# Altium PCB radxa_nx5_io_board_v1.4.PcbDoc (part 1 of 6)
Units mil, origin at the board's own origin, x right, y up, seen from the top; angles counter-clockwise.
Board outline 3937.73 x 3112.19 mil, 6 copper layers (Top, GND02, 内层3, Power4, 内层 5, Bottom), stack 58.1 mil thick; 363 components, 344 nets, 1618 pads, 1594 vias.
Unrouted connection lines stored in the file: 899.
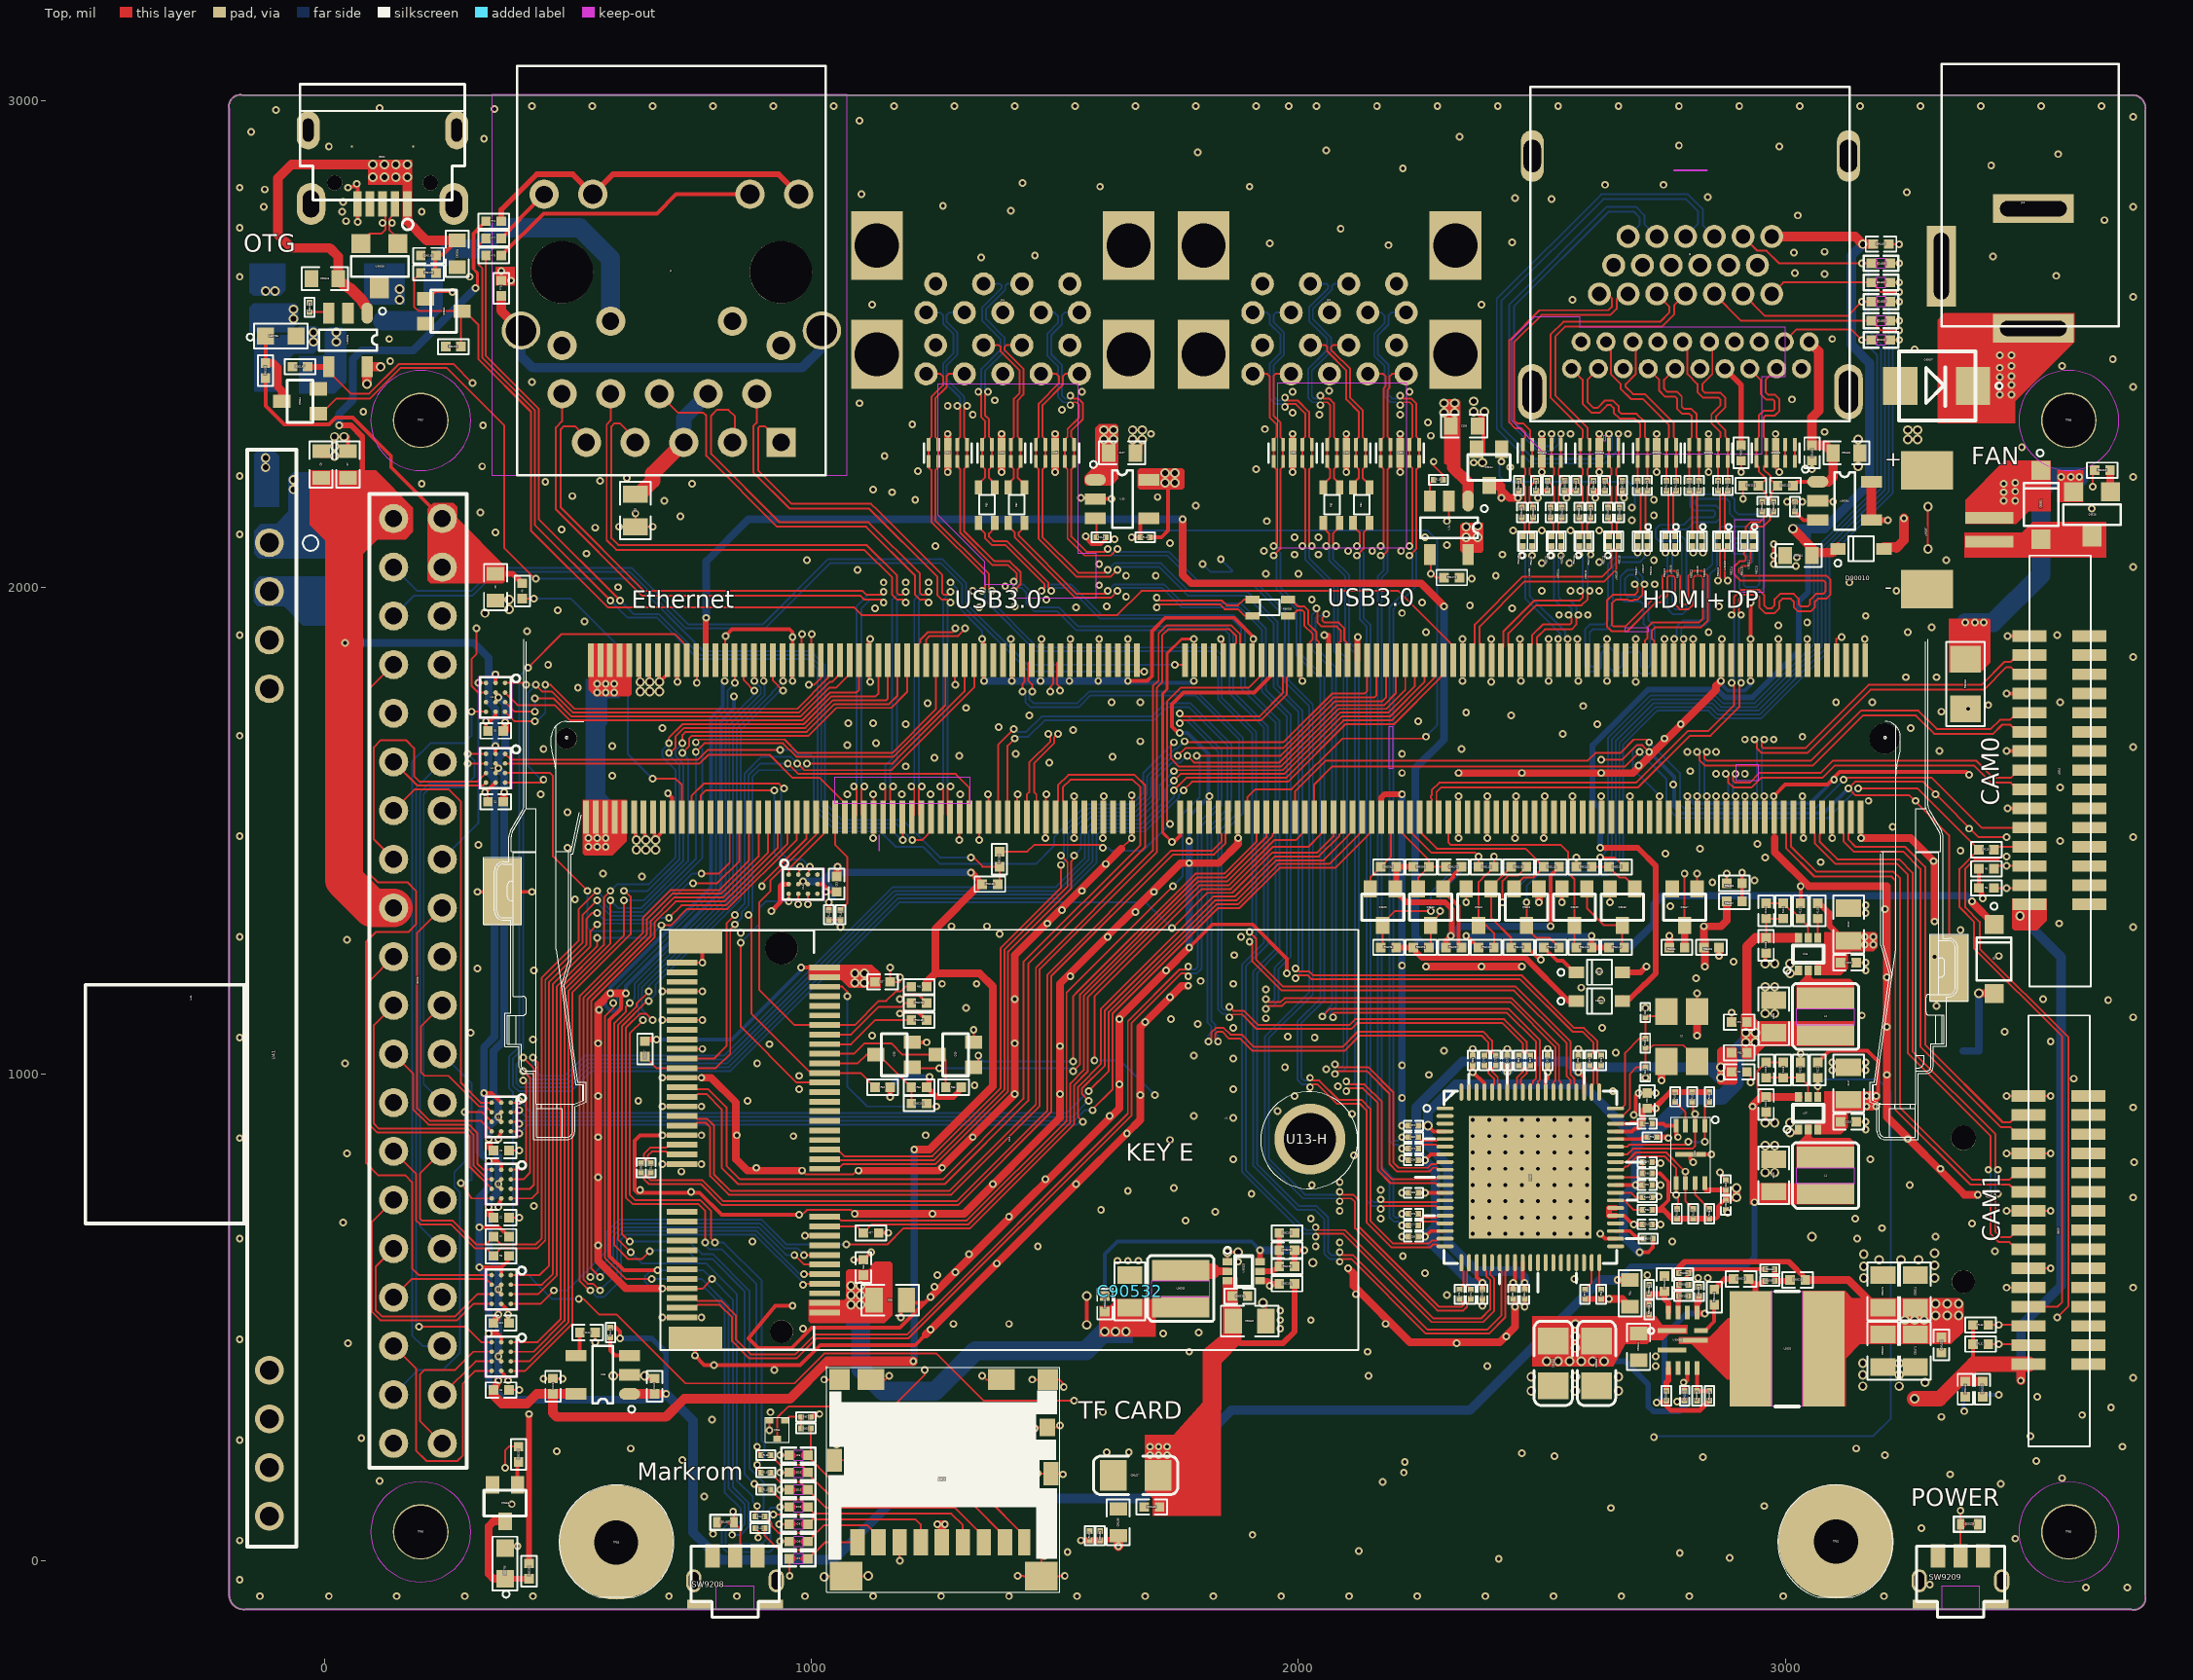
[diagram p0: Top view]
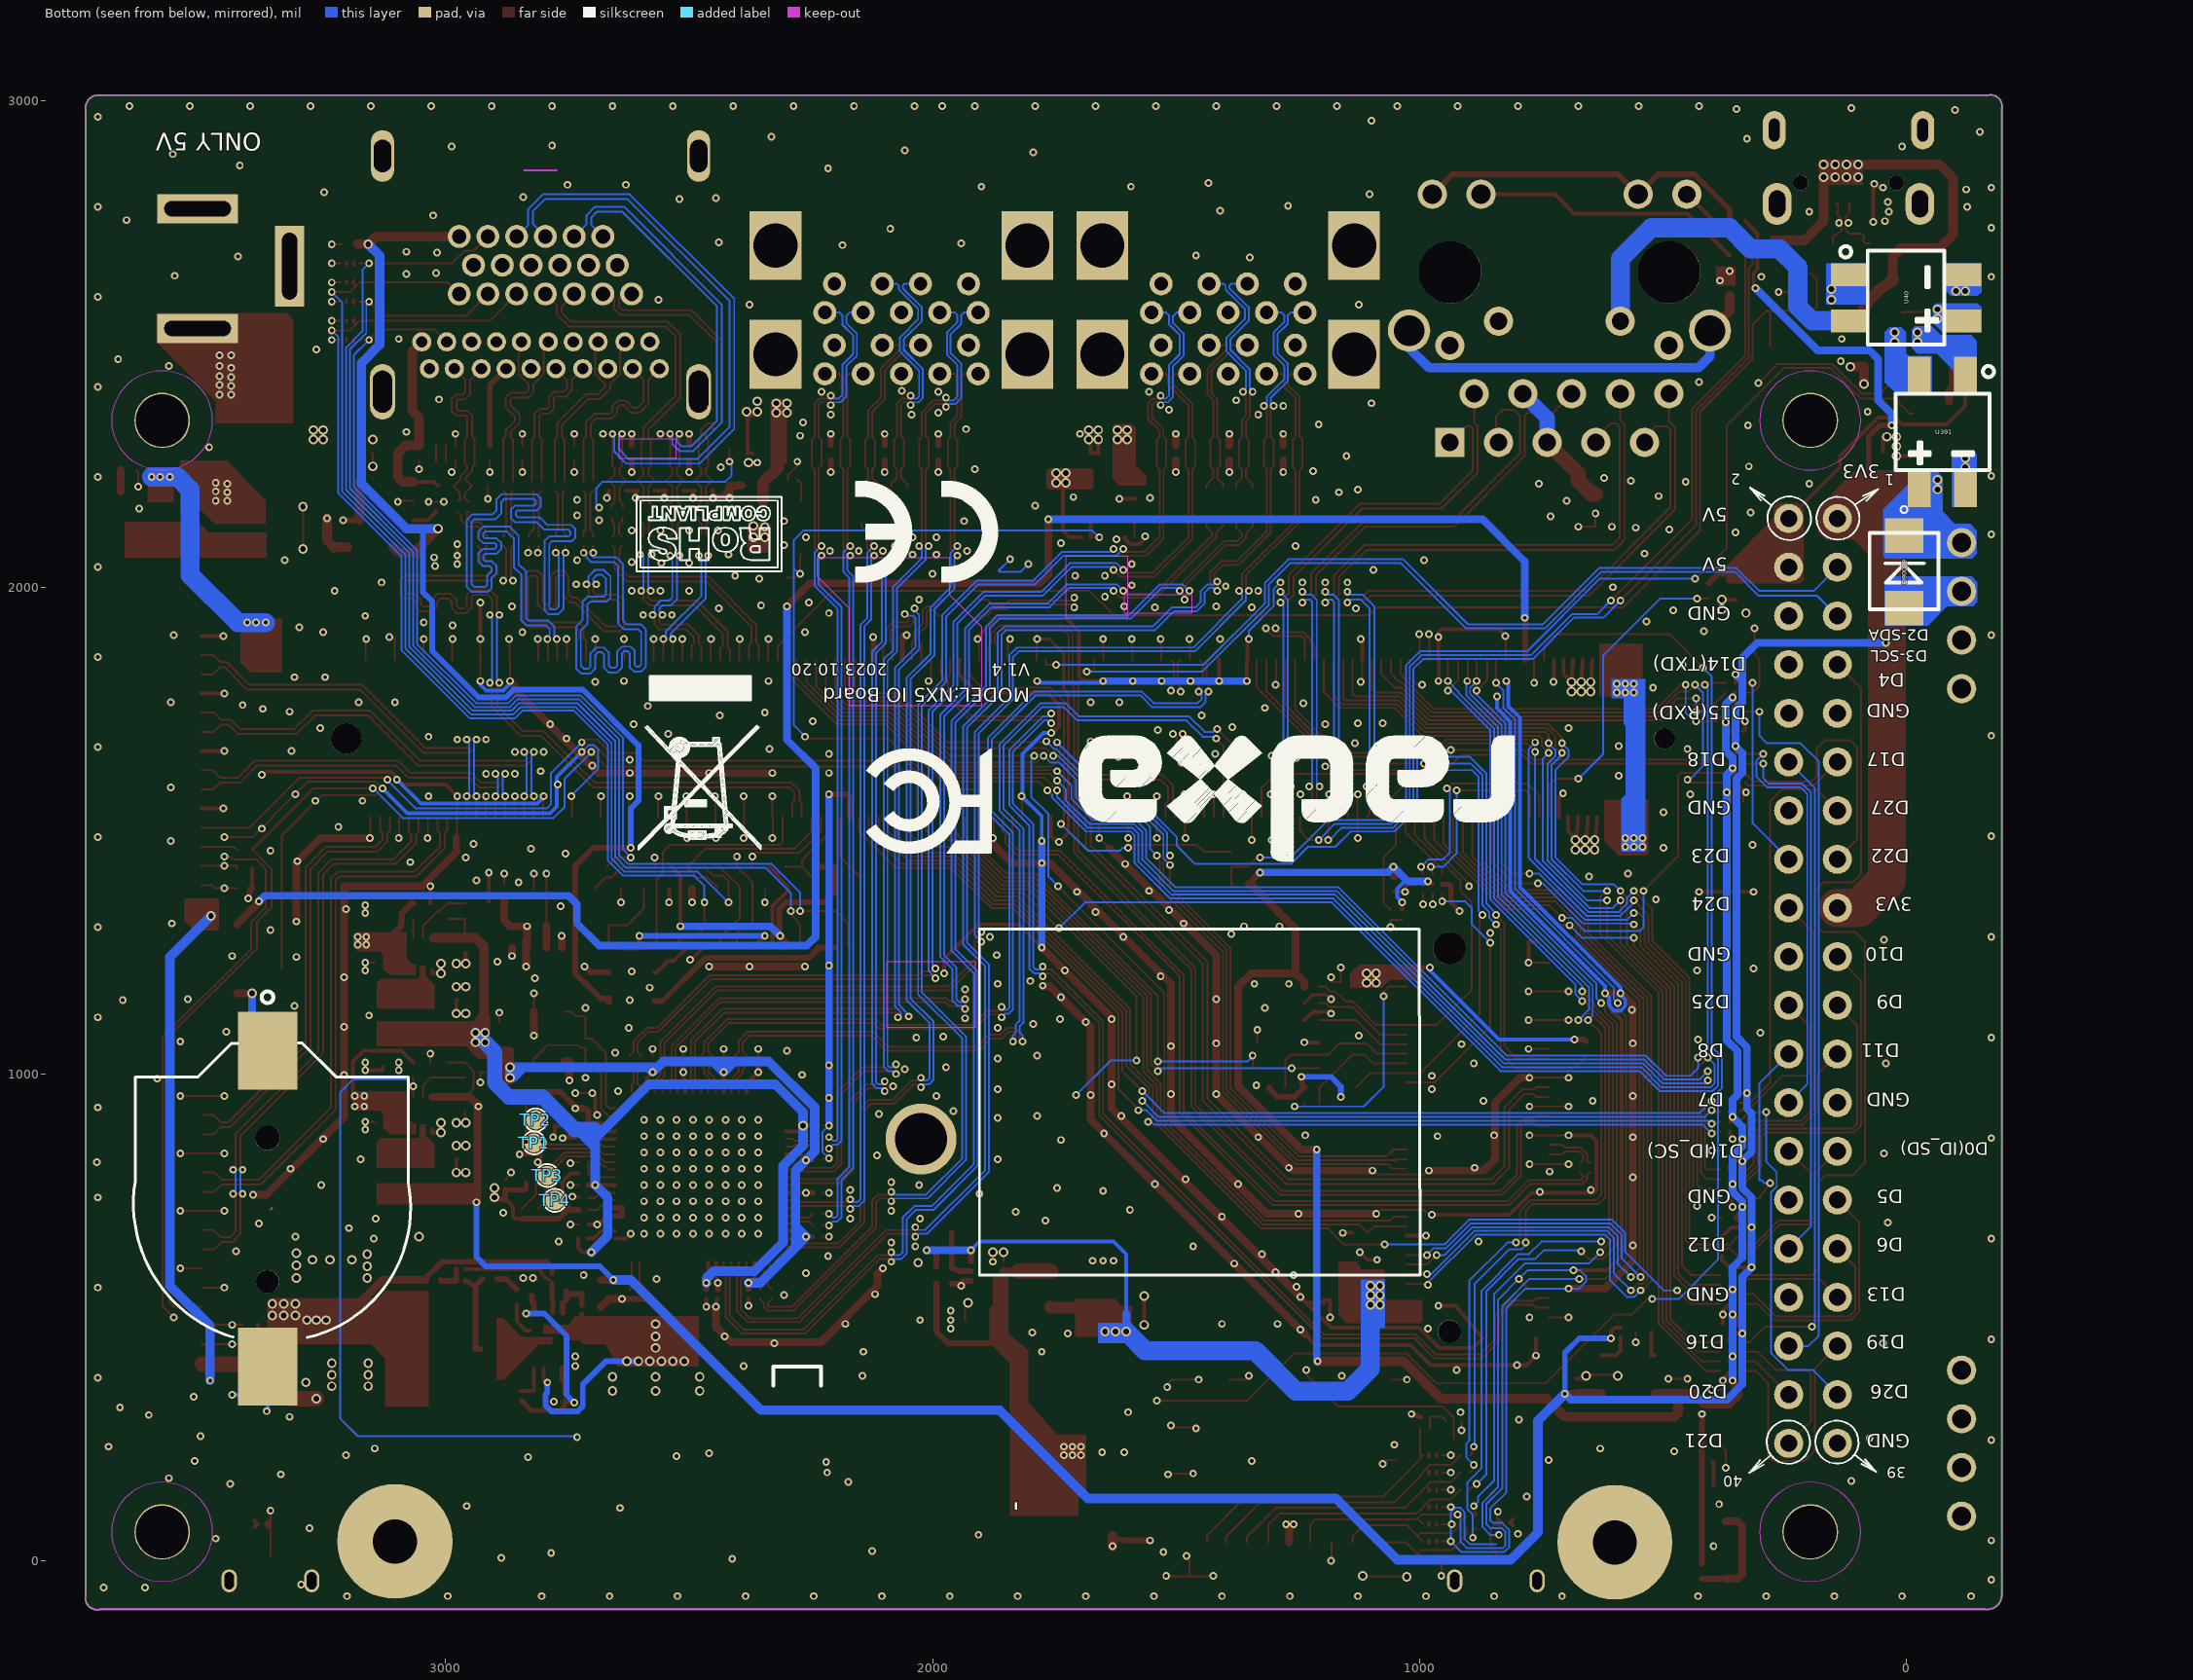
[diagram p1: Bottom view, seen from below]
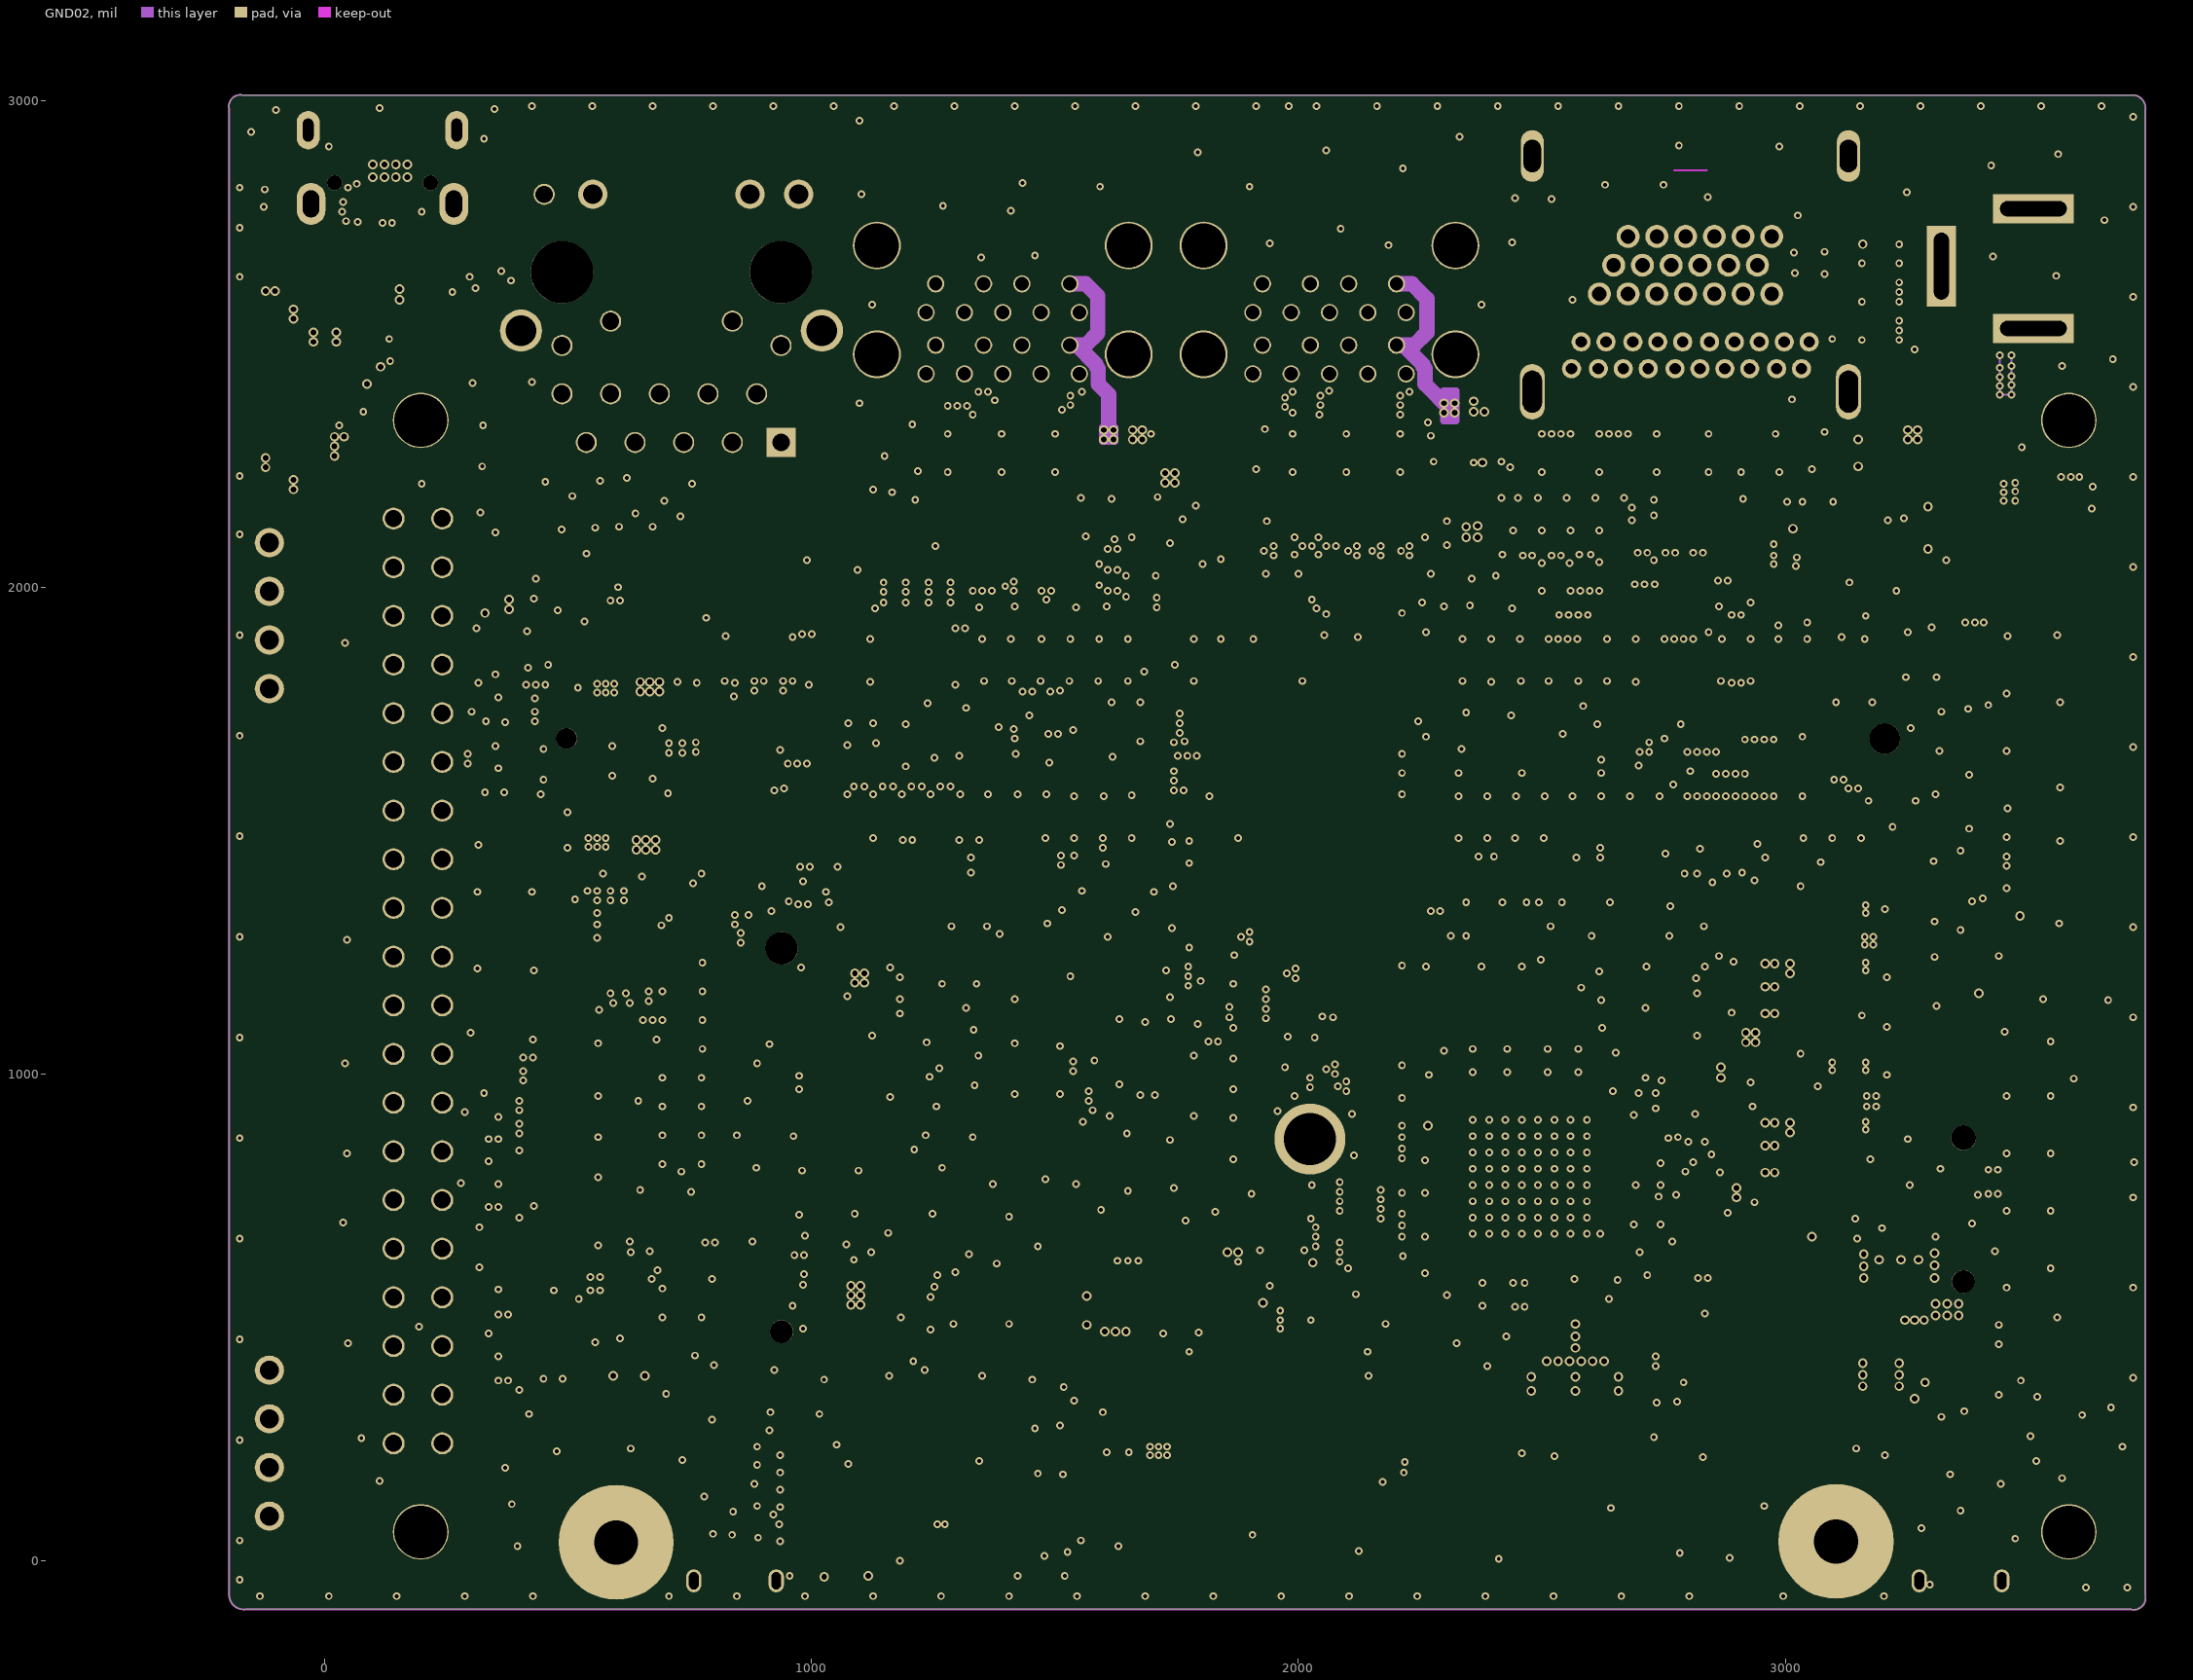
[diagram p2: GND02]
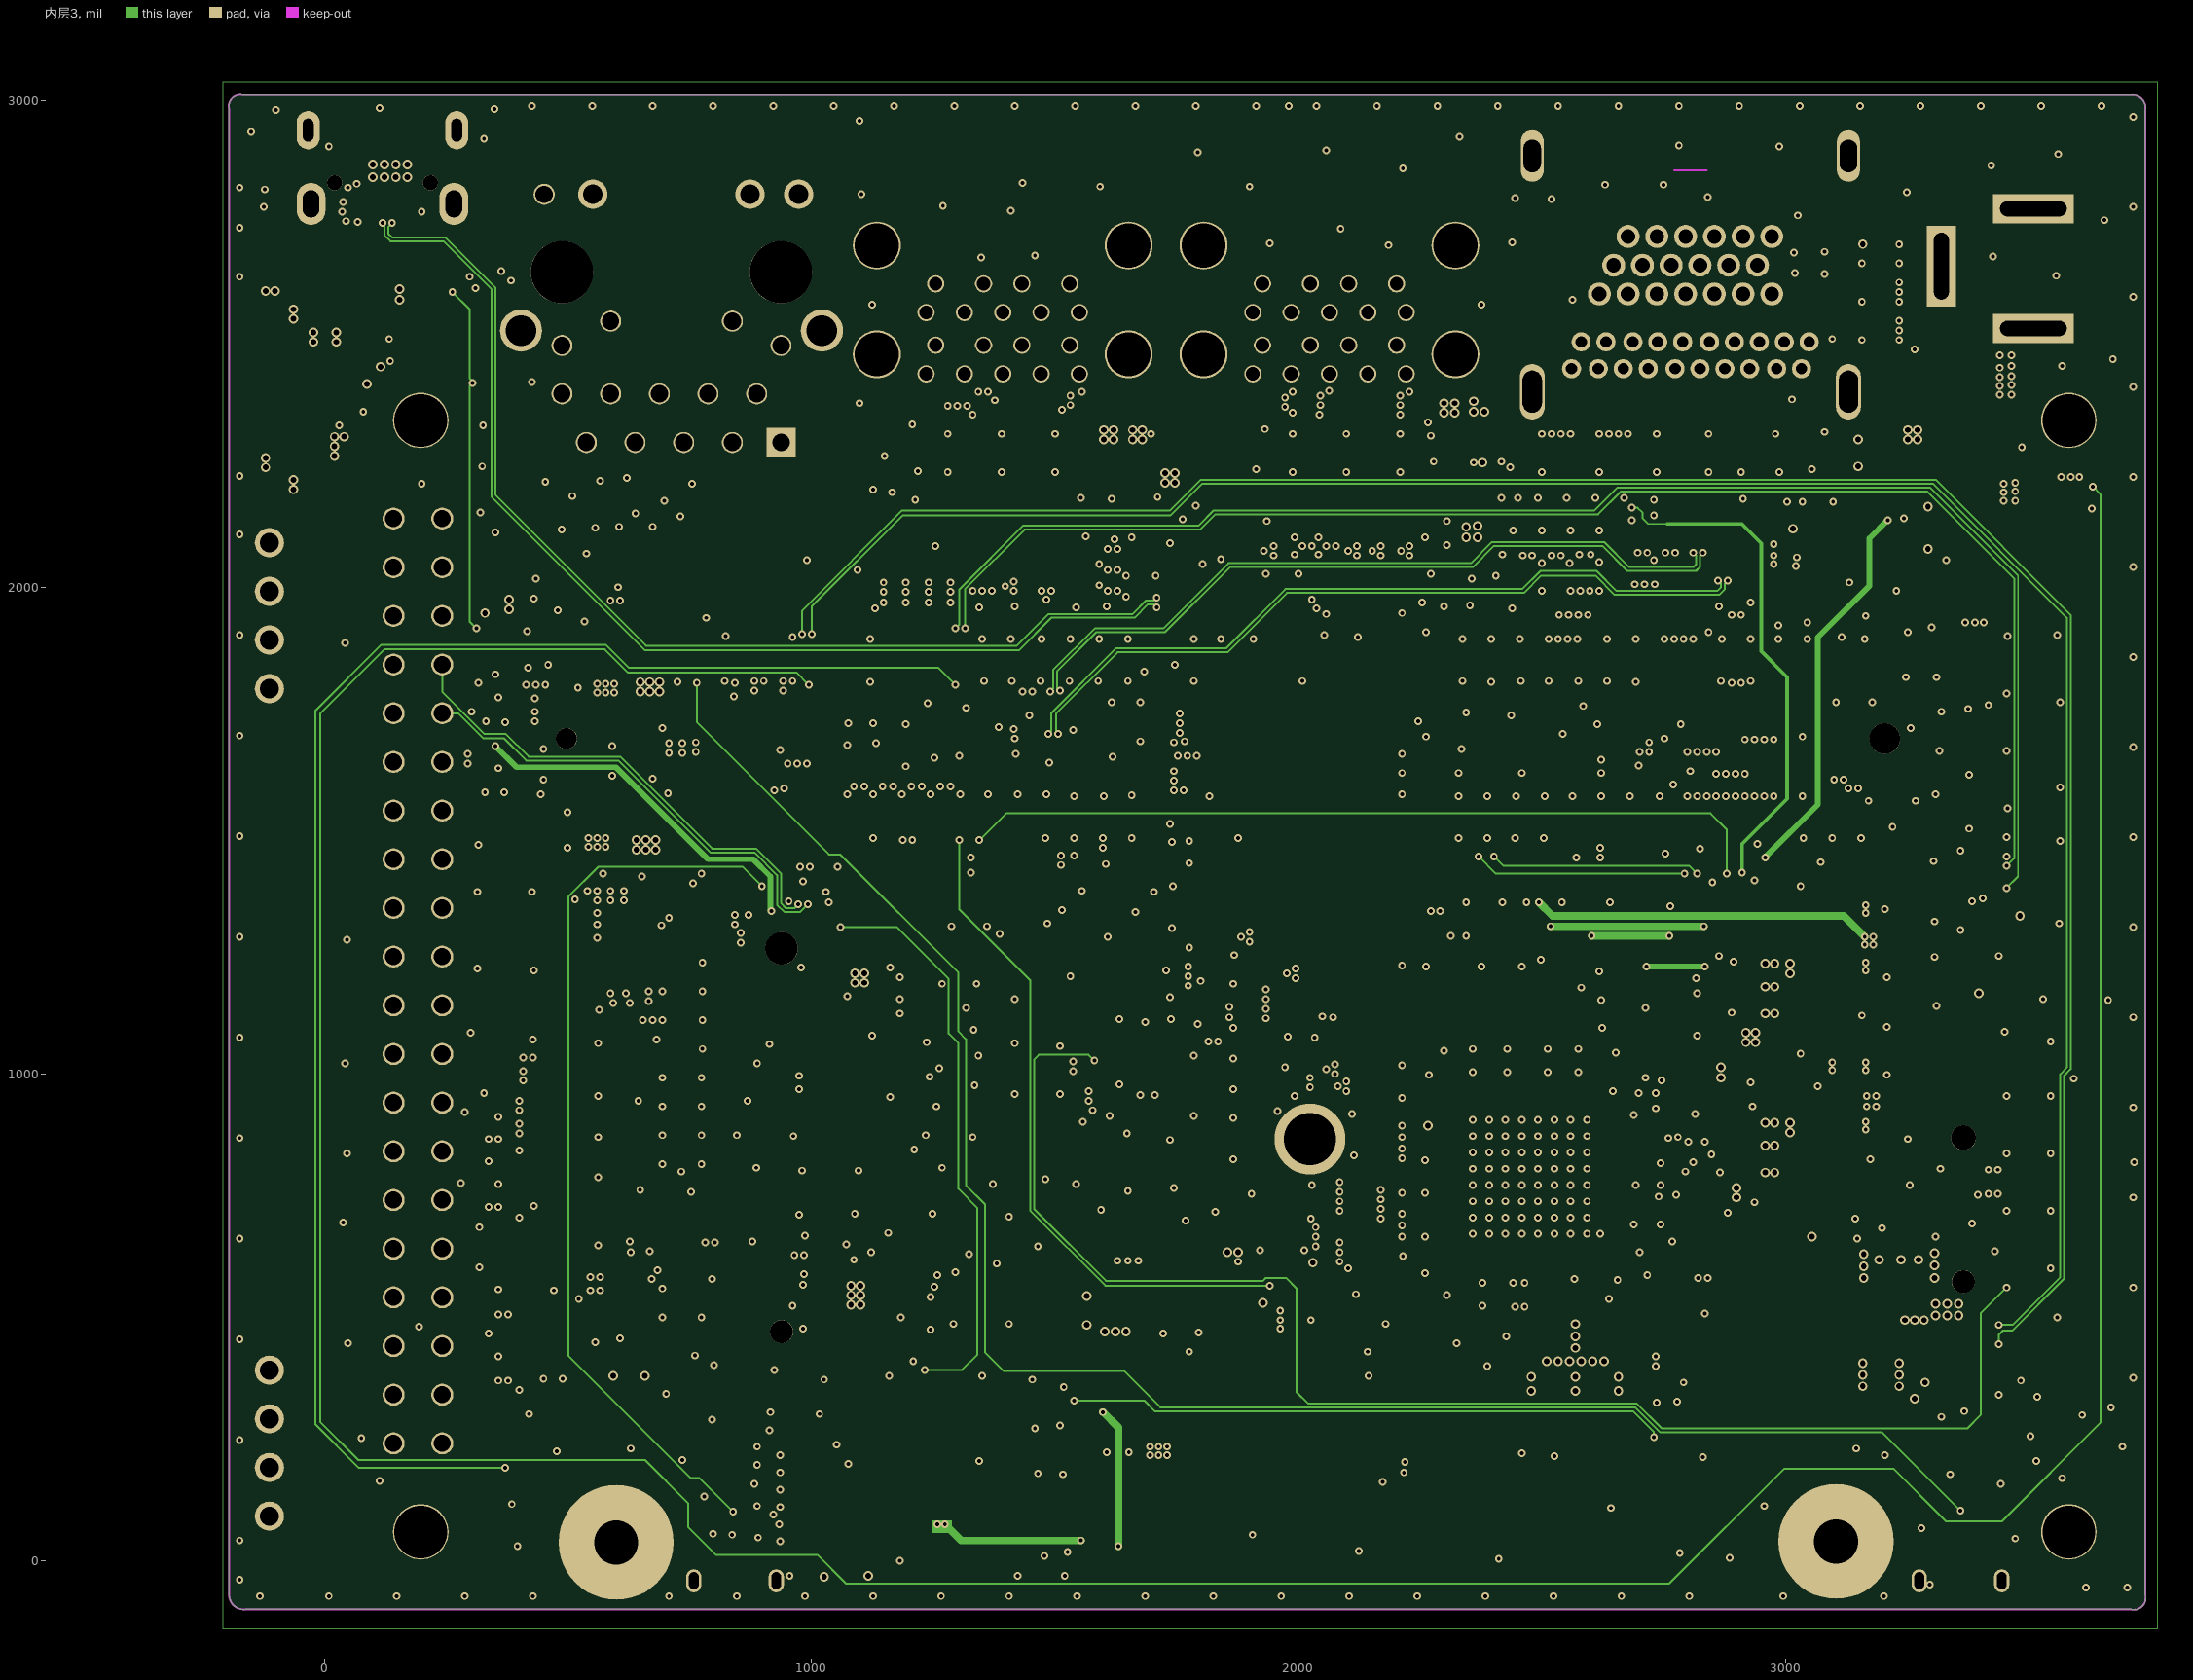
[diagram p3: 内层3]
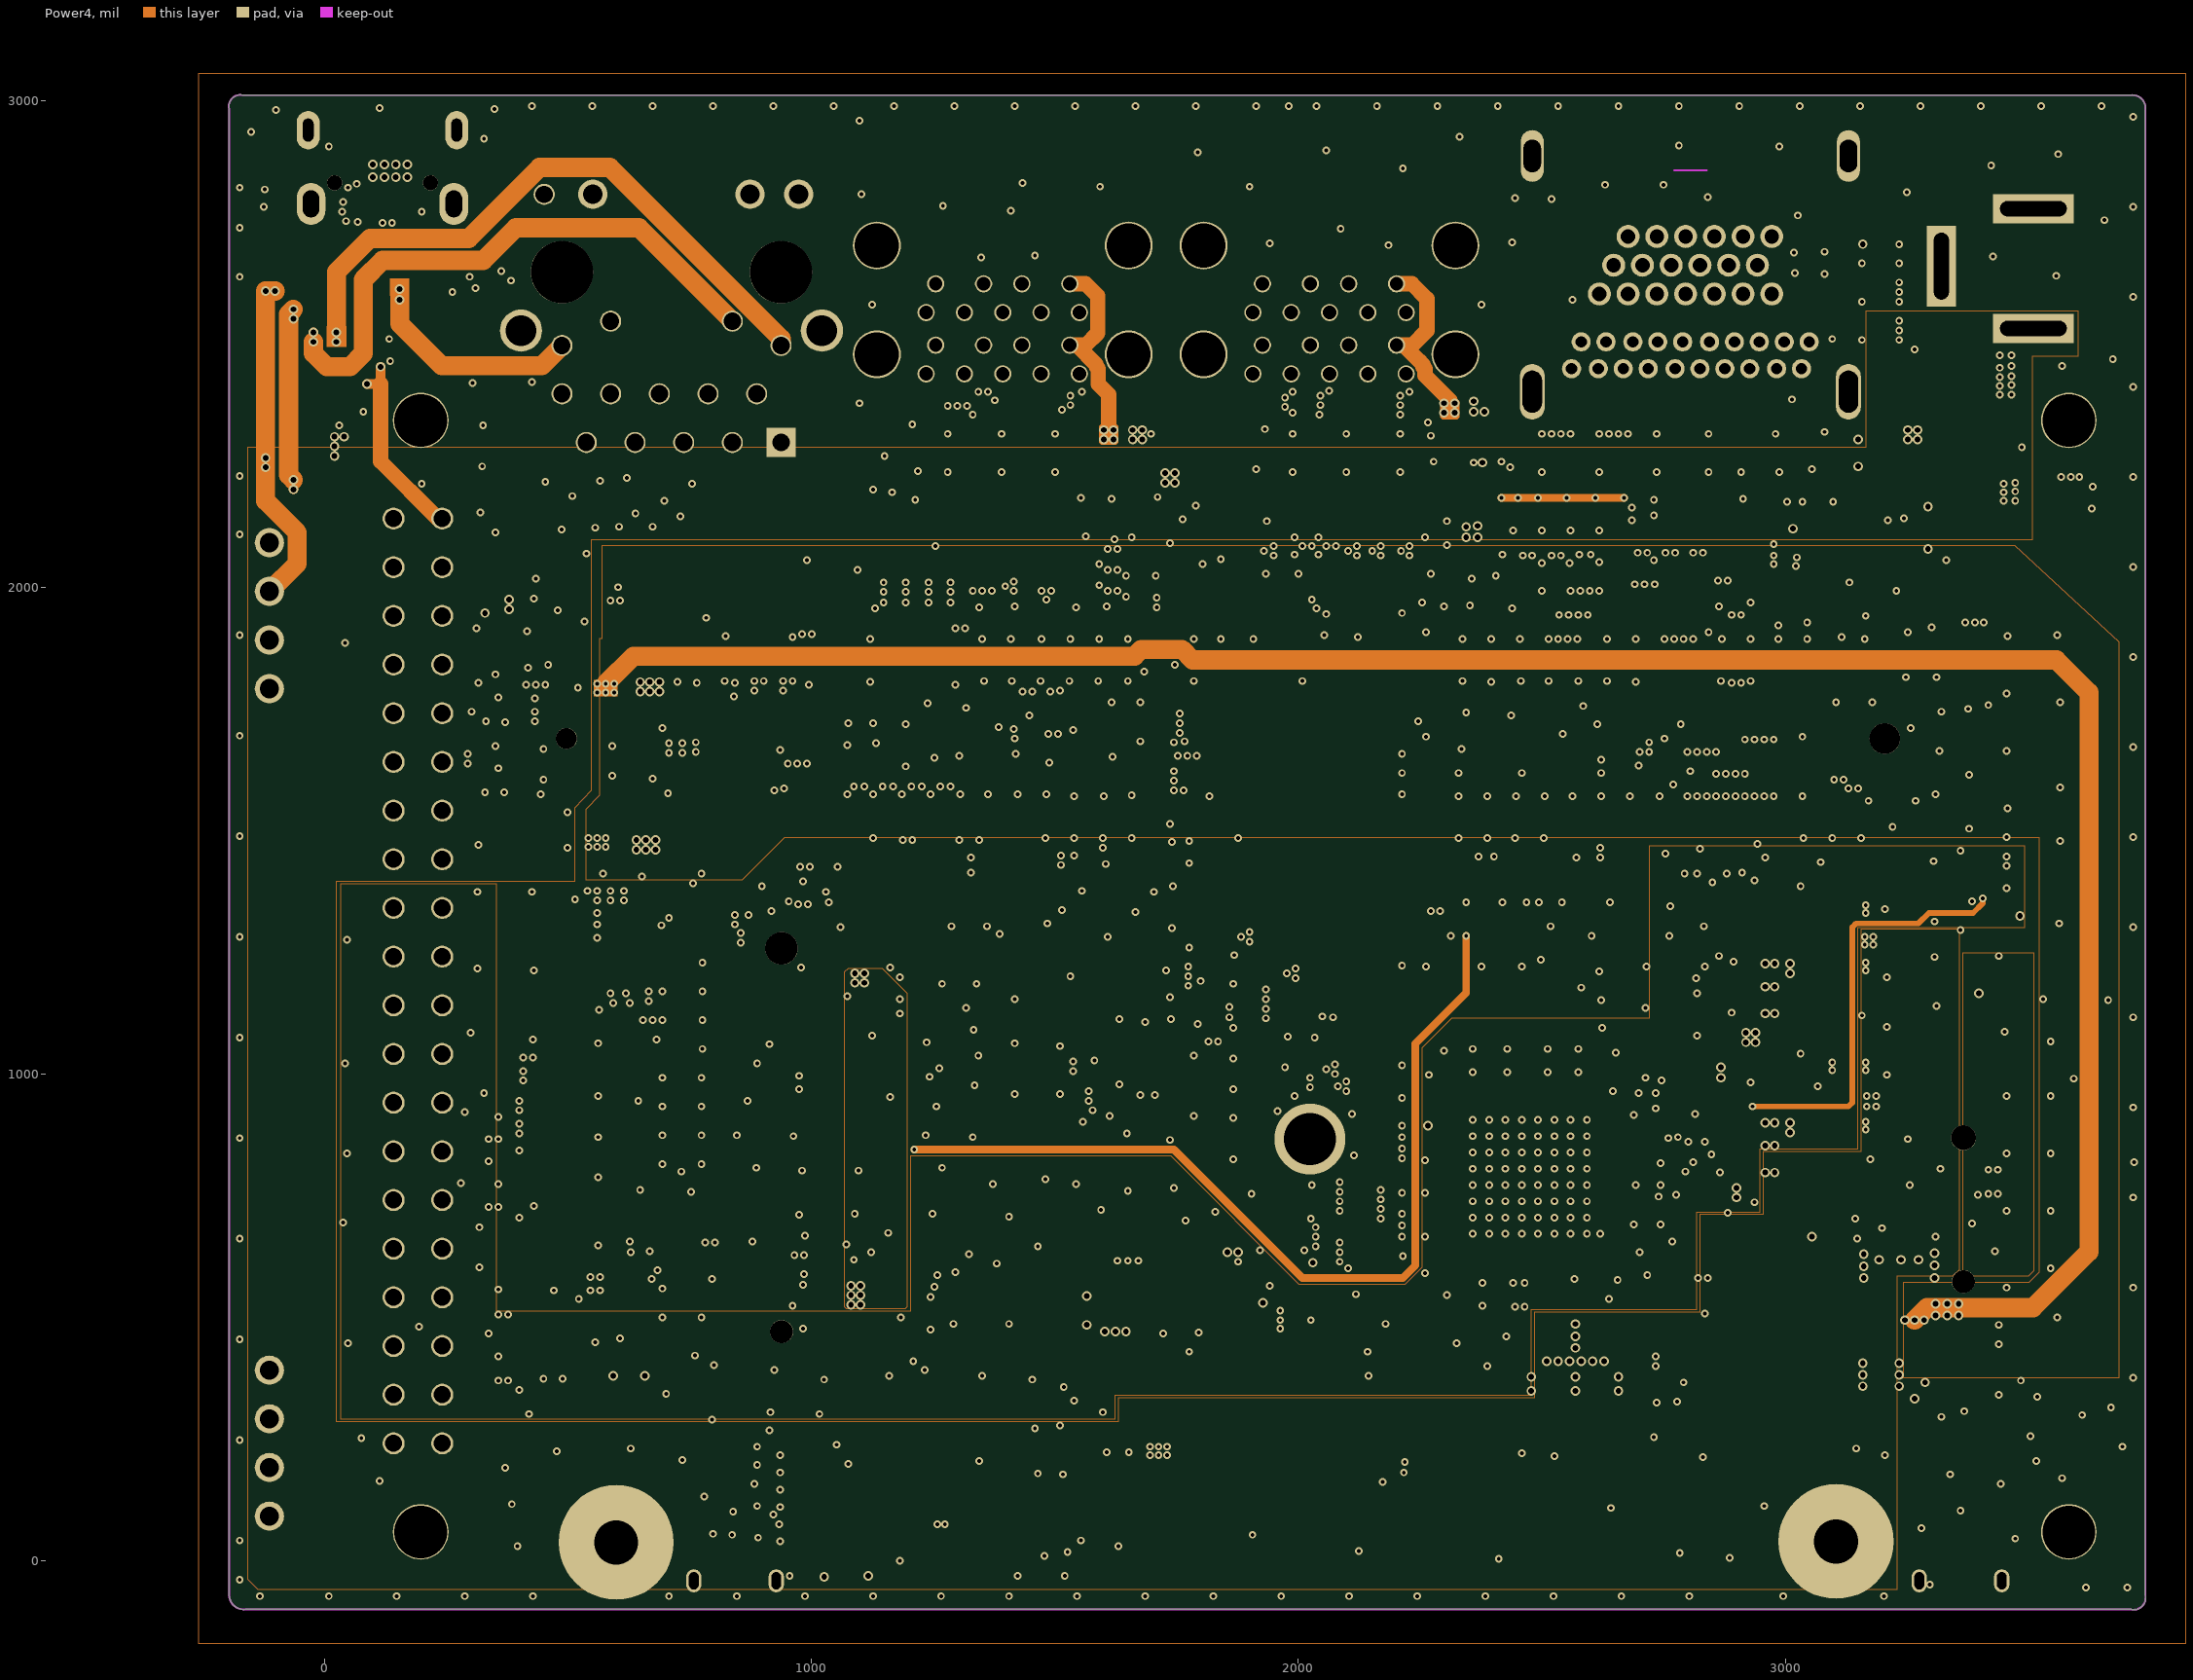
[diagram p4: Power4]

## Layer stack, top to bottom
Solder Mask Top: solder mask 0.4, Solder Resist, Dk 3.5
Top: signal copper 1.35
Dielectric 1: dielectric 10, FR-4, Dk 4.3
GND02: signal copper 1.35
Dielectric2: dielectric 10, FR-4, Dk 4.3
内层3: signal copper 1.35
Dielectric3: dielectric 10, FR-4, Dk 4.3
Power4: signal copper 1.35
Dielectric4: dielectric 10, FR-4, Dk 4.3
内层 5: signal copper 1.35
Dielectric5: dielectric 10, FR-4, Dk 4.3
Bottom: signal copper 1.35
Solder Mask Bottom: solder mask 0.4, Solder Resist, Dk 3.5

## Board outline
-196.85,2982.28 -196.85,2982.3 cw(c-173.71,2987.69) -168.31,3010.83 3708.66,3010.83 cw(c3713.07,2984.23) 3739.67,2979.82 3739.67,-70.87 cw(c3716.12,-76.61) 3710.38,-100.15 -163.39,-100.15 cw(c-166.75,-70.17) -196.73,-66.81 -196.73,2982.28

## Design rules (kind name [scope] priority, off if disabled: settings)
Clearance "Clearance - Net - DDI_TX3_C_DN" [InNet('DDI_TX3_C_DN') OR InNet('DDI_TX0_C_DN') OR InNet('DDI_TX0_C_DP') OR InNet('DDI_TX2_C_DN') OR InNet('DDI_TX2_C_DP') OR InNet('DDI_TX3_C_DP')] p1: gap=5.91 ignorepadtopadclearanceinfootprint=FALSE except(0: Arc-Hole Track-Hole SMDPad-Hole THPad-Hole Via-Hole Fill-Hole Poly-Hole Region-Hole Text-Hole; 3.94: Arc-SMDPad Arc-THPad Arc-Via Arc-Text Track-SMDPad Track-THPad Track-Via Track-Text SMDPad-SMDPad SMDPad-THPad SMDPad-Via SMDPad-Text THPad-THPad THPad-Via THPad-Text Via-Via Via-Text Fill-Text Poly-Text Region-Text; 10: Text-Text)
Clearance "Clearance - Default - DEFAULT- SMD" [IsVia vs IsSMTPin] p2: gap=0 ignorepadtopadclearanceinfootprint=FALSE
Clearance "Clearance - Default - DEFAULT - Via" [IsVia vs IsVia] p3: gap=0 ignorepadtopadclearanceinfootprint=FALSE
Clearance "Clearance - Default - DEFAULT - Net" [All] p4: gap=3.94 ignorepadtopadclearanceinfootprint=FALSE except(0: Arc-Hole Track-Hole SMDPad-Hole THPad-Hole Via-Hole Fill-Hole Poly-Hole Region-Hole Text-Hole; 5.91: Arc-Fill Arc-Poly Arc-Region Track-Fill Track-Poly Track-Region SMDPad-Fill SMDPad-Poly SMDPad-Region THPad-Fill THPad-Poly THPad-Region Via-Fill Via-Poly Via-Region Fill-Fill Fill-Poly Fill-Region Poly-Poly Poly-Region Region-Region; 10: Text-Text)
ComponentClearance "ComponentClearance - Default - DEFAULT" [All] p1: gap=3.94 collisioncheckmode=3 verticalgap=10 showdistances=FALSE
FanoutControl Fanout_Small [(CompPinCount < 5)] p3: bgadir=Out bgaviamode=Centered fanoutstyle=Auto fanoutdirection=OutThenIn viagrid=1 // Fanout_Small (Default Rule)
FanoutControl Fanout_SOIC [IsSOIC] p4: bgadir=Out bgaviamode=Centered fanoutstyle=Auto fanoutdirection=Alternating viagrid=1 // Fanout_SOIC (Default Rule)
HoleToHoleClearance "HoleToHoleClearance - Default - DEFAULT" [All] p1: gap=3.94 allowstackedmicrovias=TRUE
Length "Default Length" [All] p1: maxlimit=50000 minlimit=0
MaxMinImpedance "Default Impedance" [All] p1: minimum=50.00 maximum=150.0
ParallelSegment "Default Parallel Segment Same Layer" [All] p1: limit=1000 gap=200
ParallelSegment "Default Parallel Segment Adjasent" [All] p2: limit=1000 gap=200
PlaneConnect "Default PlaneConnect" [All] p1: planeconnectstyle=Direct reliefexpansion=20 reliefentries=4 reliefconductorwidth=15 reliefairgap=10
PolygonConnect "PolygonConnect - Default SMT" [IsSMTPin] p1: connectstyle=Direct reliefconductorwidth=10 reliefentries=4 polygonreliefangle="45 Angle" airgapwidth=10
PolygonConnect "PolygonConnect - Default Pad" [All] p2: connectstyle=Direct reliefconductorwidth=15 reliefentries=4 polygonreliefangle="45 Angle" airgapwidth=10
RoutingLayers "RoutingLayers - Default - DEFAULT" [All] p1: top layer_v5=TRUE mid layer 1_v5=TRUE mid layer 2_v5=TRUE mid layer 3_v5=TRUE mid layer 4_v5=TRUE bottom layer_v5=TRUE
RoutingPriority "RoutingPriority - Default - DEFAULT" [All] p1: routingpriority=3
RoutingTopology "Default Routing Topology" [All] p1: topology=Shortest
RoutingVias "RoutingVias - Default - DEFAULT" [All] p1: holewidth=7.87 width=15.75 viastyle="Through Hole" minholewidth=7.87 minwidth=15.75 maxholewidth=7.87 maxwidth=15.75
SMDToCorner "SMDToCorner - Default - DEFAULT" [All] p1: distance=0
SolderMaskExpansion [All] p1: expansion=4 istentingtop=FALSE
Width "Default Width" [All] p1: maxlimit=196.85 minlimit=3.94 preferedwidth=3.94
20 further rules are at their usual default settings.

## Components (designator, comment, footprint, x,y, rotation, side; value= is the part's Value field where it differs from the comment)
C2 "C0402" C0402 362.2,704.72 r180 top
C3 "C0402" C0402 362.2,842.52 r180 top
C4 "C0402" C0402 350.39,1559.06 r0 top
C5 "C0402" C0402 350.39,1704.72 r0 top
C6 "C0402" C0402 362.2,350.39 r180 top
C7 "C0603" C0603 47.24,2251.97 r90 top
C8 "C0603" C0603 -7.87,2251.97 r90 top
C9 "C0603" C0603 350.39,2000 r270 top
C10 "C0402" C0402 362.2,488.19 r180 top
C53 "C0402" C0402 1051.18,1389.76 r90 top
C54 "C0201" C0201 669.29,807.09 r270 top
C55 "C0201" C0201 649.61,807.09 r270 top
C56 "C0402" C0402 1106.3,602.36 r90 top
C57 "C0402" C0402 1145.67,1188.98 r0 top
C58 "C0805" C0805 1161.42,535.43 r0 top
C63 "C0805" C0805 637.8,2157.48 r90 top
C68 "C0201" C0201 2452.76,1027.56 r270 top
C69 "C0201" C0201 2476.38,1027.56 r270 top
C70 "C0201" C0201 2381.89,1027.56 r270 top
C71 "C0201" C0201 2405.51,1027.56 r270 top
C72 "C0201" C0201 2598.43,1027.56 r90 top
C73 "C0201" C0201 2622.05,1027.56 r90 top
C74 "C0201" C0201 2354.33,547.24 r270 top
C75 "C0201" C0201 2330.71,547.24 r270 top
C76 "C0201" C0201 2716.54,818.9 r0 top
C77 "C0201" C0201 2236.22,688.98 r180 top
C78 "C0201" C0201 2236.22,712.6 r180 top
C79 "C0201" C0201 2236.22,846.46 r180 top
C80 "C0201" C0201 2236.22,870.08 r180 top
C81 "C0201" C0201 2877.95,730.32 r270 top
C82 "C0201" C0201 2877.95,771.65 r90 top
C83 "C0201" C0201 2712.6,1125.98 r90 top
C84 "C0201" C0201 2712.6,1003.94 r270 top
C85 "C0201" C0201 2716.54,897.64 r0 top
C86 "C0201" C0201 2358.27,1027.56 r90 top
C87 "C0201" C0201 2511.81,1027.56 r90 top
C88 "C0201" C0201 2236.22,755.91 r180 top
C89 "C0201" C0201 2440.94,547.24 r270 top
C90 "C0402" C0402 2716.54,944.88 r90 top
C91 "C0402" C0402 2905.51,1106.3 r180 top
C92 "C0402" C0402 2905.51,1003.94 r0 top
C93 "C0201" C0201 2236.22,893.7 r180 top
C94 "C0201" C0201 2464.57,547.24 r270 top
C95 "C0201" C0201 2716.54,771.65 r0 top
C96 "C0201" C0201 2574.8,1027.56 r90 top
C97 "C0201" C0201 2429.13,1027.56 r90 top
C98 "C0201" C0201 2236.22,822.83 r180 top
C99 "C0201" C0201 2236.22,665.35 r180 top
C100 "C0201" C0201 2377.95,547.24 r270 top
C101 "C0201" C0201 2716.54,690.94 r0 top
C102 "C0805" C0805 3129.92,1307.09 r90 top
C103 "C0402" C0402 3129.92,1228.35 r0 top
C104 "C0402" C0402 2960.63,1334.65 r90 top
C105 "C0805" C0805 2976.38,1118.11 r90 top
C106 "C0402" C0402 2960.63,1263.78 r270 top
C107 "C0603" C0603 1637.8,2275.59 r0 top
C108 "C0603" C0603 2340.55,2330.71 r0 top
C117 "C0805" C0805 3129.92,980.32 r90 top
C118 "C0402" C0402 3129.92,901.57 r0 top
C119 "C0402" C0402 2960.63,1007.87 r270 top
C120 "C0805" C0805 2976.38,791.34 r90 top
C121 "C0402" C0402 2960.63,937.01 r270 top
C122 "C0402" C0402 677.17,358.27 r90 top
C123 "C0402" C0402 468.5,358.27 r90 top
C124 "C0402" C0402 539.37,468.5 r0 top
C300 "C0201" C0201 2696.85,2208.66 r90 top
C90194 "C0603" C0603 271.65,2685.04 r270 top
C90195 "C0402" C0402 212.6,2681.1 r180 top
C90414 "C1206" C1206 2612.2,405.51 r270 top
C90415 "C1206" C1206 2523.62,405.51 r270 top
C90418 "C0402" C0402 3370.08,352.36 r90 top
C90419 "C0402" C0402 3405.51,352.36 r90 top
C90422 "C0402" C0402 3320.87,442.91 r270 top
C90424 "C0402" C0402 2751.97,568.9 r90 top
C90425 "C0201" C0201 2793.31,338.58 r270 top
C90426 "C0201" C0201 2822.83,553.15 r90 top
C90427 "C1206" C1206 1665.35,175.2 r180 top
C90428 "C0402" C0402 1698.82,110.24 r180 top
C90461 "C0201" C0201 2458.66,2153.54 r90 top
C90462 "C0201" C0201 2482.28,2153.54 r90 top
C90463 "C0201" C0201 2517.72,2153.54 r90 top
C90464 "C0201" C0201 2541.34,2153.54 r90 top
C90465 "C0201" C0201 2576.77,2153.54 r90 top
C90466 "C0201" C0201 2600.39,2153.54 r90 top
C90467 "C0201" C0201 2635.83,2153.54 r90 top
C90468 "C0201" C0201 2659.45,2153.54 r90 top
C90469 "C0402" C0402 3196.85,2704.72 r0 top
C90472 "C0402" C0402 2318.9,1425.2 r180 top
C90473 "C0201" C0201 2881.89,2208.66 r90 top
C90474 "C0805" C0805 3267.72,431.1 r270 top
C90475 "C0805" C0805 3200.79,553.15 r90 top
C90476 "C0201" C0201 2803.15,2208.66 r90 top
C90477 "C0201" C0201 2775.59,2208.66 r90 top
C90478 "C0201" C0201 2755.91,2208.66 r90 top
C90479 "C0201" C0201 2716.54,2208.66 r90 top
C90482 "C0402" C0402 3055.12,2275.59 r270 top
C90483 "C0603" C0603 3125.98,2275.59 r0 top
C90484 "C0603" C0603 3027.56,2064.96 r180 top
C90485 "C0201" C0201 2952.76,2165.35 r270 top
C90486 "C0201" C0201 2976.38,2165.35 r270 top
C90495 "R0201" R0201 1592.52,51.18 r90 top
C90496 "C0603" C0603 1629.92,78.74 r90 top
C90520 "C0402" C0402 3025.59,576.77 r0 top
C90521 "C0603" C0603 2698.82,438.98 r270 top
C90522 "C0805" C0805 3200.79,431.1 r270 top
C90523 "C0402" C0402 2909.45,578.74 r0 top
C90524 "C0805" C0805 3267.72,553.15 r90 top
C90526 "C0201" C0201 2862.2,2208.66 r90 top
C90527 "C0201" C0201 2822.83,2208.66 r90 top
C90528 "C0603" C0603 0,2633.86 r180 top
C90529 "C0402" C0402 1976.38,637.8 r180 top
C90530 "C0805" C0805 1899.61,492.13 r0 top
C90531 "C0402" C0402 1879.92,543.31 r0 top
C90532 "C0805" C0805 1653.54,553.15 r90 top
C90533 "C0402" C0402 1602.36,527.56 r90 top
CON1 "DIP40PIN-2.54MM_FX" DIP40PIN-2.54MM_FX 190.94,1190.94 r270 top
D1 "SOD_123" SOD_123 3429.13,1236.22 r90 top
D6 "ESD0402" ESD0402 972.44,216.54 r180 top
D7 "ESD0402" ESD0402 972.44,3.94 r180 top
D8 "ESD0402" ESD0402 972.44,39.37 r180 top
D9 "ESD0402" ESD0402 972.44,74.8 r180 top
D10 "ESD0402" ESD0402 972.44,110.24 r180 top
D11 "ESD0402" ESD0402 972.44,145.67 r180 top
D12 "ESD0402" ESD0402 972.44,181.1 r180 top
D5001 "SOD_123A" SOD_123A 3525.59,2169.29 r90 top
D5005 "SOD_323" SOD_323 2618.11,1149.61 r180 top
D5007 "SOD_323" SOD_323 2618.11,1208.66 r180 top
D90007 "DO214AA" DO214AA 3377.95,2413.39 r180 top
D90009 "DO214AA" DO214AA 3.94,2098.43 r270 bottom
D90010 "SOD_323A" SOD_323A 3155.51,2078.74 r180 top
ED4807 "E0402N" E0402N 822.83,78.74 r180 top
ED4815 "SON10_2R50X1R00X0R50" SON10_2R50X1R00X0R50 2500,2275.59 r0 top
ED4816 "SON10_2R50X1R00X0R50" SON10_2R50X1R00X0R50 2618.11,2275.59 r0 top
ED4817 "ESD0402" ESD0402 3196.85,2625.98 r0 top
ED4818 "ESD0402" ESD0402 3196.85,2665.35 r0 top
ED4819 "ESD0402" ESD0402 3196.85,2586.61 r0 top
ED4820 "ESD0402" ESD0402 3196.85,2547.24 r0 top
ED8124 "SON10_2R50X1R00X0R50" SON10_2R50X1R00X0R50 2736.22,2275.59 r0 top
ED8125 "SON10_2R50X1R00X0R50" SON10_2R50X1R00X0R50 2842.52,2275.59 r0 top
ED8126 "SON10_2R50X1R00X0R50" SON10_2R50X1R00X0R50 2980.32,2275.59 r0 top
ED8127 "ESD0402" ESD0402 3196.85,2507.87 r0 top
ED8128 "E0402N" E0402N 3377.95,74.8 r0 top
FB1 "L0402" L0402 2905.51,1043.31 r180 top
FB2 "WCM2012F" WCM2012F 1437.01,2204.72 r270 top
FB3 "WCM2012F" WCM2012F 1375.98,2204.72 r270 top
FB4 "WCM2012F" WCM2012F 2145.67,2204.72 r270 top
FB5 "WCM2012F" WCM2012F 2084.65,2204.72 r270 top
FB6605 "WCM2012F" WCM2012F 1905.51,1974.41 r0 top
J2 "BAT_CR1220-2" BAT_CR1220-2 3366.14,718.5 r180 bottom
J4 "RJ45_HRK1" RJ45_HRK1 937.01,2297.24 r180 top
J6 "1852139-0N055T-H" 1852139-0N055T-H 2805.12,2870.08 r180 top
J11 "USB30_DUAL" USB30_DUAL 1133.86,2478.35 r180 top
J12 "USB30_DUAL" USB30_DUAL 1805.12,2478.35 r180 top
J13 "DCJACK5520" DCJACK5520 3509.84,3072.83 r180 top
J9803 "MICRO_USB_2" MICRO_USB_2 118.11,2787.4 r180 top
J9809 "FPC15PIN-1.0MM-LS" FPC15PIN-1.0MM-LS 3500,403.54 r90 top
J9810 "FPC15PIN-1.0MM-LS" FPC15PIN-1.0MM-LS 3501.97,1348.43 r90 top
J9813 "TF008" TF008 1271.65,187.01 r0 top
L2 "IND_3X3" IND_3X3 3082.68,1118.11 r180 top
L4 "IND_3X3" IND_3X3 3082.68,791.34 r180 top
L5001 "IND_606045" IND_606045 3003.94,435.04 r0 top
L90015 "IND_3X3" IND_3X3 1757.87,559.06 r180 top
LED705 "LED0603" LED0603 -90.55,2515.75 r0 top
LED706 "LED0603" LED0603 370.08,-5.91 r90 top
Q18 "SOT_323" SOT_323 1169.29,1039.37 r90 top
Q19 "SOT_323" SOT_323 1295.28,1039.37 r90 top
Q955 "SOT723" SOT723 944.88,287.4 r180 top
Q9518 "SOT23" SOT23 3629.92,2149.61 r180 top
Q9529 "SOT_323" SOT_323 2173.23,1342.52 r180 top
Q9530 "SOT_323" SOT_323 2271.65,1342.52 r180 top
Q9532 "SOT_323" SOT_323 2370.08,1342.52 r180 top
Q9533 "SOT_323" SOT_323 2468.5,1342.52 r180 top
Q9534 "SOT_323" SOT_323 2391.73,2246.06 r180 top
Q9538 "SOT_323" SOT_323 2665.35,1342.52 r180 top
Q9539 "SOT_323" SOT_323 2566.93,1342.52 r180 top
Q9554 "SOT_323" SOT_323 -51.18,2381.89 r90 top
Q9555 "SOT_323" SOT_323 244.09,2566.93 r270 top
Q9556 "SOT_323" SOT_323 370.08,118.11 r180 top
Q9557 "SOT_323" SOT_323 2793.31,1342.52 r180 top
R5 "R0402" R0402 3413.39,1421.26 r180 top
R6 "R0402" R0402 3413.39,1381.89 r180 top
R7 "R0402" R0402 362.2,665.35 r0 top
R8 "R0402" R0402 362.2,625.98 r0 top
R9 "R0402" R0402 405.51,1992.13 r90 top
R57 "R0402" R0402 1122.05,673.23 r0 top
R60 "R0402" R0402 1145.67,972.44 r0 top
R61 "R0402" R0402 1220.47,1179.13 r0 top
R65 "R0402" R0402 1220.47,972.44 r0 top
R66 "R0402" R0402 1291.34,972.44 r0 top
R75 "R0402" R0402 346.46,2751.97 r0 top
R76 "R0402" R0402 346.46,2681.1 r0 top
R77 "R0402" R0402 346.46,2716.54 r0 top
R78 "R0402" R0402 362.2,2614.17 r270 top
R94 "R0603" R0603 2681.1,549.21 r270 top
R95 "R0201" R0201 2716.54,720.47 r180 top
R96 "R0201" R0201 2622.05,547.24 r90 top
R97 "R0201" R0201 2588.58,547.24 r90 top
R98 "R0201" R0201 2726.38,870.08 r180 top
R99 "R0201" R0201 2716.54,795.28 r180 top
R101 "R0201" R0201 2712.6,1062.99 r270 top
R102 "R0201" R0201 2844.49,952.76 r270 top
R103 "R0201" R0201 2716.54,746.06 r0 top
R104 "R0201" R0201 2809.06,952.76 r270 top
R105 "R0201" R0201 2844.49,712.6 r270 top
R106 "R0201" R0201 2773.62,952.76 r270 top
R107 "R0201" R0201 2811.02,712.6 r270 top
R108 "R0201" R0201 2777.56,712.6 r270 top
R109 "R0201" R0201 2718.5,661.42 r180 top
R110 "R0402" R0402 3066.93,1334.65 r270 top
R111 "R0402" R0402 2996.06,1334.65 r90 top
R112 "R0402" R0402 3031.5,1334.65 r90 top
R113 "R0201" R0201 1685.04,2102.36 r180 top
R114 "R0201" R0201 1594.49,2102.36 r0 top
R116 "R0201" R0201 2287.4,2220.47 r0 top
R122 "R0402" R0402 3066.93,1007.87 r270 top
R123 "R0402" R0402 2996.06,1007.87 r270 top
R124 "R0201" R0201 586.61,468.5 r270 top
R125 "R0402" R0402 3031.5,1007.87 r90 top
R126 "R0402" R0402 3413.39,1460.63 r0 top
R127 "R0201" R0201 1570.87,51.18 r90 top
R132 "R0402" R0402 3401.57,444.88 r180 top
R133 "R0402" R0402 3401.57,484.25 r180 top
R138 "R0201" R0201 905.51,216.54 r0 top
R139 "R0201" R0201 905.51,181.1 r0 top
R140 "R0201" R0201 905.51,145.67 r0 top
R141 "R0201" R0201 893.7,90.55 r0 top
R142 "R0201" R0201 893.7,66.93 r0 top
R144 "R0201" R0201 1035.43,1326.77 r90 top
R145 "R0201" R0201 1059.06,1326.77 r270 top
R500 "R0402" R0402 2909.45,2275.59 r270 top
R951 "R0201" R0201 988.19,295.28 r0 top
R953 "R0201" R0201 988.19,271.65 r180 top
R95046 "R0402" R0402 2854.33,541.34 r90 top
R95048 "R0201" R0201 2720.47,515.75 r270 top
R95050 "R0201" R0201 2968.5,574.8 r0 top
R95051 "R0201" R0201 2791.34,590.55 r0 top
R95052 "R0201" R0201 2968.5,598.43 r180 top
R95054 "R0201" R0201 2720.47,557.09 r270 top
R95055 "R0201" R0201 2791.34,566.93 r0 top
R95056 "R0201" R0201 2755.91,338.58 r90 top
R95057 "R0201" R0201 2844.49,338.58 r90 top
R95058 "R0201" R0201 2818.9,338.58 r270 top
R95059 "R0402" R0402 3651.57,2240.16 r180 top
R95060 "R1206" R1206 3370.08,1801.18 r270 top
R95094 "R0402" R0402 2185.04,1425.2 r180 top
R95095 "R0402" R0402 2185.04,1259.84 r180 top
R95096 "R0402" R0402 2251.97,1425.2 r0 top
R95097 "R0402" R0402 2318.9,1259.84 r0 top
R95098 "R0402" R0402 2251.97,1259.84 r0 top
R95100 "R0402" R0402 2385.83,1259.84 r180 top
R95101 "R0201" R0201 2547.24,2208.66 r270 top
R95102 "R0201" R0201 2511.81,2208.66 r270 top
R95103 "R0201" R0201 2606.3,2208.66 r270 top
R95104 "R0201" R0201 2570.87,2208.66 r270 top
R95105 "R0402" R0402 2452.76,1425.2 r0 top
R95106 "R0201" R0201 2665.35,2208.66 r270 top
R95107 "R0201" R0201 2629.92,2208.66 r270 top
R95108 "R0201" R0201 2488.19,2208.66 r270 top
R95109 "R0201" R0201 2452.76,2208.66 r270 top
R95110 "R0402" R0402 2452.76,1259.84 r180 top
R95111 "R0402" R0402 2519.69,1425.2 r180 top
R95112 "R0402" R0402 2519.69,1259.84 r0 top
R95114 "R0402" R0402 2385.83,1425.2 r0 top
R95115 "R0402" R0402 2586.61,1425.2 r0 top
R95116 "R0402" R0402 2653.54,1425.2 r0 top
R95117 "R0402" R0402 2653.54,1259.84 r180 top
R95118 "R0402" R0402 2586.61,1259.84 r0 top
R95119 "R0402" R0402 2929.13,2208.66 r0 top
R95120 "R0402" R0402 3000,2208.66 r180 top
R95121 "R0201" R0201 3019.69,2165.35 r90 top
R95171 "R0402" R0402 2314.96,2019.69 r180 top
R95180 "R0402" R0402 1385.83,1440.94 r270 top
R95181 "R0402" R0402 1366.14,1389.76 r180 top
R95188 "R0201" R0201 2791.34,543.31 r0 top
R95189 "R0402" R0402 1220.47,1110.24 r0 top
R95190 "R0402" R0402 1220.47,1145.67 r0 top
R95191 "R0402" R0402 212.6,2645.67 r0 top
R95192 "R0402" R0402 263.78,2494.09 r180 top
R95195 "R0201" R0201 -31.5,2574.8 r90 top
R95197 "R0402" R0402 -51.18,2452.76 r0 top
R95198 "R0402" R0402 -122.05,2444.88 r270 top
R95199 "R0402" R0402 1976.38,604.33 r180 top
R95200 "R0402" R0402 1976.38,673.23 r0 top
R95201 "R0402" R0402 1976.38,568.9 r180 top
R95202 "R0402" R0402 1220.47,938.98 r0 top
R95203 "R0402" R0402 419.29,-21.65 r90 top
R95204 "R0402" R0402 397.64,218.5 r270 top
R95205 "R0402" R0402 2777.56,1259.84 r180 top
R95206 "R0402" R0402 2848.43,1259.84 r180 top
R95207 "R0402" R0402 2895.67,1354.33 r0 top
R95208 "R0402" R0402 2895.67,1391.73 r0 top
R95209 "R0201" R0201 2460.63,2094.49 r270 top
R95210 "R0201" R0201 2480.32,2094.49 r270 top
R95211 "R0201" R0201 2519.69,2094.49 r270 top
R95212 "R0201" R0201 2539.37,2094.49 r270 top
R95213 "R0201" R0201 2576.77,2094.49 r270 top
R95214 "R0201" R0201 2596.46,2094.49 r270 top
R95215 "R0201" R0201 2637.8,2094.49 r270 top
R95216 "R0201" R0201 2657.48,2094.49 r270 top
R95217 "R0201" R0201 2696.85,2094.49 r90 top
R95218 "R0201" R0201 2716.54,2094.49 r90 top
R95219 "R0201" R0201 2753.94,2094.49 r90 top
R95220 "R0201" R0201 2773.62,2094.49 r90 top
R95221 "R0201" R0201 2809.06,2094.49 r90 top
R95222 "R0201" R0201 2828.74,2094.49 r90 top
R95223 "R0201" R0201 2862.2,2094.49 r90 top
R95224 "R0201" R0201 2881.89,2094.49 r90 top
R95225 "R0201" R0201 2913.39,2094.49 r90 top
R95226 "R0201" R0201 2933.07,2094.49 r90 top
R95227 "R0402" R0402 657.48,1051.18 r90 top
SW9208 "TS018B-" TS018B- 842.52,-100.39 r0 top
SW9209 "TS018B-" TS018B- 3360.24,-100.39 r0 top
TP1 "TP" TP 2818.9,858.27 r90 bottom
TP2 "TP" TP 2814.96,905.51 r90 bottom
TP3 "TP" TP 2791.34,791.34 r90 bottom
TP4 "TP" TP 2775.59,740.16 r90 bottom
TP85 "HOLE5X2_75" HOLE5X2_75 3582.68,59.06 r0 top
TP87 "HOLE5X2_75" HOLE5X2_75 196.85,2342.52 r0 top
TP88 "HOLE5X2_75" HOLE5X2_75 3582.68,2342.52 r0 top
TP90 "HOLE5X2_75" HOLE5X2_75 196.85,59.06 r0 top
TP92 "H3_5X6XH7_5A" H3_5X6XH7_5A 3104.33,39.37 r0 top
TP93 "H3_5X6XH7_5A" H3_5X6XH7_5A 598.43,37.4 r0 top
U1 "DDR4-SODIMM-SOCKET" DDR4-SODIMM-SOCKET 3204.72,1688.98 r0 top
U3 "CSP-12" CSP-12 342.52,803.15 r0 top
U4 "CSP-12" CSP-12 342.52,940.94 r0 top
U5 "CSP-12" CSP-12 330.71,1657.48 r0 top
U6 "CSP-12" CSP-12 330.71,1803.15 r0 top
U7 "CSP-12" CSP-12 342.52,448.82 r0 top
U8 "CSP-12" CSP-12 342.52,586.61 r0 top
U13 "M2_NGFF_KEY_E_1" M2_NGFF_KEY_E_1 879.92,864.17 r90 top
U14 "CSP-12" CSP-12 952.76,1370.08 r90 top
U24 "GL3523_OTY30" GL3523_OTY30 2476.38,787.4 r270 top
U25 "USON8" USON8 2814.96,893.7 r270 top
U26 "SOT563" SOT563 3027.56,1212.6 r0 top
U27 "SON10_2R50X1R00X0R50" SON10_2R50X1R00X0R50 1279.53,2275.59 r180 top
U28 "SON10_2R50X1R00X0R50" SON10_2R50X1R00X0R50 1389.76,2275.59 r0 top
U29 "SON10_2R50X1R00X0R50" SON10_2R50X1R00X0R50 1500,2275.59 r0 top
U30 "SOT_23_5" SOT_23_5 1582.68,2220.47 r0 top
U31 "SON10_2R50X1R00X0R50" SON10_2R50X1R00X0R50 1988.19,2275.59 r180 top
U32 "SON10_2R50X1R00X0R50" SON10_2R50X1R00X0R50 2098.43,2275.59 r0 top
U33 "SON10_2R50X1R00X0R50" SON10_2R50X1R00X0R50 2208.66,2275.59 r0 top
U34 "SOT_23_5A" SOT_23_5A 2348.43,2177.17 r270 top
U36 "SOT_23_5" SOT_23_5 625.98,342.52 r180 top
U37 "SOT563" SOT563 3027.56,885.83 r0 top
U40 "MBS" MBS -118.11,2641.73 r90 bottom
U41 "DP5305" DP5305 -114.17,1791.34 r270 top
U391 "MBS" MBS -122.05,2200.79 r180 bottom
U4106 "TCM0605T" TCM0605T 2470.47,2094.49 r90 top
U90030 "SOT23" SOT23 112.2,2659.45 r180 top
U90086 "QFN12_2R00X3R00X1R00" QFN12_2R00X3R00X1R00 2789.37,452.76 r0 top
U90087 "SMD-2P-1.25" SMD-2P-1.25 3409.45,2118.11 r270 top
U90094 "SOT_23_5B" SOT_23_5B 3066.93,2216.54 r0 top
U90096 "SOT_23_5" SOT_23_5 86.61,2562.99 r270 top
U90103 "SOT563" SOT563 1854.33,614.17 r270 top
U90104 "TCM0605T" TCM0605T 2529.53,2094.49 r90 top
U90105 "TCM0605T" TCM0605T 2586.61,2094.49 r90 top
U90106 "TCM0605T" TCM0605T 2647.64,2094.49 r90 top
U90107 "TCM0605T" TCM0605T 2706.69,2094.49 r270 top
U90108 "TCM0605T" TCM0605T 2763.78,2094.49 r270 top
U90109 "TCM0605T" TCM0605T 2818.9,2094.49 r270 top
U90110 "TCM0605T" TCM0605T 2872.05,2094.49 r270 top
U90111 "TCM0605T" TCM0605T 2925.2,2094.49 r270 top
X2 "CRY-D3225" CRY-D3225 2787.4,1076.77 r270 top

## Footprints (in the part's own frame and the unit in brackets; to place one, negate y for a bottom-side part, rotate by r counter-clockwise, add the part's x,y. Pads: shape width x height; smd on the part's side, far side on the other; paste and mask are expansions set on the pad)
1852139-0N055T-H [mm]
  oval 1.2x2.7 hole 0.9 slot 1.7 at 90 deg: 1(8.25,-0.4) 4(-8.25,-0.4)
  oval 1.5x2.9 / inner oval 1.3x2.9 / far side oval 1.3x2.9 hole 1 slot 2.184 at 90 deg: 2(8.25,11.9) 3(-8.25,11.9)
  round 1 hole 0.6: D1(6.2,10.7) D2(5.7,9.3) D3(4.8,10.7) D4(4.4,9.3) D5(3.5,10.7) D6(3,9.3) D7(2.2,10.7) D8(1.7,9.3) D9(0.8,10.7) D10(0.4,9.3) D11(-0.5,10.7) D12(-1,9.3) D13(-1.8,10.7) D14(-2.3,9.3) D15(-3.1,10.7) D16(-3.6,9.3) D17(-4.5,10.7) D18(-4.9,9.3) D19(-5.8,10.7) D20(-6.2,9.3)
  round 1.2 hole 0.75: H1(4.75,6.8) H2(4,5.3) H3(3.25,6.8) H4(3.25,3.8) H5(2.5,5.3) H6(1.75,3.8) H7(1.75,6.8) H8(1,5.3) H9(0.25,6.8) H10(0.25,3.8) H11(-0.5,5.3) H12(-1.25,3.8) H13(-1.25,6.8) H14(-2,5.3) H15(-2.75,6.8) H16(-2.75,3.8) H17(-3.5,5.3) H18(-4.25,3.8) H19(-4.25,6.8)
  silkscreen extent -8.3,-4 8.35,13.45
BAT_CR1220-2 [mm]
  rect 3.099x4.064 smd: 1(0,8.348) 2(0,-8.134)
  round 1.2 hole 1.2 unplated: 3(0,-3.685)
  round 1.3 hole 1.3 unplated: 4(0,3.815)
  silkscreen extent -7,-6.61 7.47,11.45
C0201 [mm]
  rect 0.3x0.3 smd: 1(-0.25,0) 2(0.25,0)
  silkscreen extent -0.5,-0.25 0.5,0.25
C0402 [mm]
  rect 0.5x0.5 smd: 1(-0.4,0) 2(0.4,0)
  silkscreen extent -0.8,-0.4 0.8,0.4
C0603 [mm]
  rect 0.7x0.9 smd: 1(-0.7,0) 2(0.7,0)
  silkscreen extent -1.2,-0.6 1.2,0.6
C0805 [mm]
  rect 0.9x1.3 smd: 1(-0.85,0) 2(0.85,0)
  silkscreen extent -1.5,-0.8 1.5,0.8
C1206 [mil]
  rect 55.12x62.99 smd mask+1.97: 1(-46,0) 2(46,0)
  silkscreen extent -87,-39 87,39
CRY-D3225 [mm]
  rect 1.4x1.15 smd: 1(-1.3,-0.8) 2(1.3,-0.8) 3(1.3,0.8) 4(-1.3,0.8)
CSP-12 [mm]
  round 0.24 smd: A1(0,0) A2(0.5,0) A3(1,0) B1(0,-0.5) B2(0.5,-0.5) B3(1,-0.5) C1(0,-1) C2(0.5,-1) C3(1,-1) D1(0,-1.5) D2(0.5,-1.5) D3(1,-1.5)
  Top keep-out region: -0.35,0.35 1.35,0.35 1.35,-1.85 -0.35,-1.85 -0.35,0.35
  silkscreen extent -0.3,-1.8 1.78,0.44
DCJACK5520 [mm]
  rect 4.2x1.5 / inner rect 4.2x1.524 / far side rect 4.2x1.524 hole 0.787 slot 3.48 at 0 deg: 1(0,13.75) 3(0,7.5)
  rect 1.5x4.2 / inner rect 1.524x4.2 / far side rect 1.524x4.2 hole 0.787 slot 3.48 at 90 deg: 2(4.8,10.5)
  silkscreen extent -4.45,-0.05 4.8,13.65
DDR4-SODIMM-SOCKET [mm]
  rect 0.3x1.75 smd: 1(-1.025,4.1) 2(-1.275,-4.1) 3(-1.525,4.1) 4(-1.775,-4.1) 5(-2.025,4.1) 6(-2.275,-4.1) 7(-2.525,4.1) 8(-2.775,-4.1) 9(-3.025,4.1) 10(-3.275,-4.1) 11(-3.525,4.1) 12(-3.775,-4.1) 13(-4.025,4.1) 14(-4.275,-4.1) 15(-4.525,4.1) 16(-4.775,-4.1) 17(-5.025,4.1) 18(-5.275,-4.1) 19(-5.525,4.1) 20(-5.775,-4.1) 21(-6.025,4.1) 22(-6.275,-4.1) 23(-6.525,4.1) 24(-6.775,-4.1) 25(-7.025,4.1) 26(-7.275,-4.1) 27(-7.525,4.1) 28(-7.775,-4.1) 29(-8.025,4.1) 30(-8.275,-4.1) 31(-8.525,4.1) 32(-8.775,-4.1) 33(-9.025,4.1) 34(-9.275,-4.1) 35(-9.525,4.1) 36(-9.775,-4.1) 37(-10.025,4.1) 38(-10.275,-4.1) 39(-10.525,4.1) 40(-10.775,-4.1) 41(-11.025,4.1) 42(-11.275,-4.1) 43(-11.525,4.1) 44(-11.775,-4.1) 45(-12.025,4.1) 46(-12.275,-4.1) 47(-12.525,4.1) 48(-12.775,-4.1) 49(-13.025,4.1) 50(-13.275,-4.1) 51(-13.525,4.1) 52(-13.775,-4.1) 53(-14.025,4.1) 54(-14.275,-4.1) 55(-14.525,4.1) 56(-14.775,-4.1) 57(-15.025,4.1) 58(-15.275,-4.1) 59(-15.525,4.1) 60(-15.775,-4.1) 61(-16.025,4.1) 62(-16.275,-4.1) 63(-16.525,4.1) 64(-16.775,-4.1) 65(-17.025,4.1) 66(-17.275,-4.1) 67(-17.525,4.1) 68(-17.775,-4.1) 69(-18.025,4.1) 70(-18.275,-4.1) 71(-18.525,4.1) 72(-18.775,-4.1) 73(-19.025,4.1) 74(-19.275,-4.1) 75(-19.525,4.1) 76(-19.775,-4.1) 77(-20.025,4.1) 78(-20.275,-4.1) 79(-20.525,4.1) 80(-20.775,-4.1) 81(-21.025,4.1) 82(-21.275,-4.1) 83(-21.525,4.1) 84(-21.775,-4.1) 85(-22.025,4.1) 86(-22.275,-4.1) 87(-22.525,4.1) 88(-22.775,-4.1) 89(-23.025,4.1) 90(-23.275,-4.1) 91(-23.525,4.1) 92(-23.775,-4.1) 93(-24.025,4.1) 94(-24.275,-4.1) 95(-24.525,4.1) 96(-24.775,-4.1) 97(-25.025,4.1) 98(-25.275,-4.1) 99(-25.525,4.1) 100(-25.775,-4.1) 101(-26.025,4.1) 102(-26.275,-4.1) 103(-26.525,4.1) 104(-26.775,-4.1) 105(-27.025,4.1) 106(-27.275,-4.1) 107(-27.525,4.1) 108(-27.775,-4.1) 109(-28.025,4.1) 110(-28.275,-4.1) 111(-28.525,4.1) 112(-28.775,-4.1) 113(-29.025,4.1) 114(-29.275,-4.1) 115(-29.525,4.1) 116(-29.775,-4.1) 117(-30.025,4.1) 118(-30.275,-4.1) 119(-30.525,4.1) 120(-30.775,-4.1) 121(-31.025,4.1) 122(-31.275,-4.1) 123(-31.525,4.1) 124(-31.775,-4.1) 125(-32.025,4.1) 126(-32.275,-4.1) 127(-32.525,4.1) 128(-32.775,-4.1) 129(-33.025,4.1) 130(-33.275,-4.1) 131(-33.525,4.1) 132(-33.775,-4.1) 133(-34.025,4.1) 134(-34.275,-4.1) 135(-34.525,4.1) 136(-34.775,-4.1) 137(-35.025,4.1) 138(-35.275,-4.1) 139(-35.525,4.1) 140(-35.775,-4.1) 141(-36.025,4.1) 142(-36.275,-4.1) 143(-36.525,4.1) 144(-36.775,-4.1) 145(-39.025,4.1) 146(-39.275,-4.1) 147(-39.525,4.1) 148(-39.775,-4.1) 149(-40.025,4.1) 150(-40.275,-4.1) 151(-40.525,4.1) 152(-40.775,-4.1) 153(-41.025,4.1) 154(-41.275,-4.1) 155(-41.525,4.1) 156(-41.775,-4.1) 157(-42.025,4.1) 158(-42.275,-4.1) 159(-42.525,4.1) 160(-42.775,-4.1) 161(-43.025,4.1) 162(-43.275,-4.1) 163(-43.525,4.1) 164(-43.775,-4.1) 165(-44.025,4.1) 166(-44.275,-4.1) 167(-44.525,4.1) 168(-44.775,-4.1) 169(-45.025,4.1) 170(-45.275,-4.1) 171(-45.525,4.1) 172(-45.775,-4.1) 173(-46.025,4.1) 174(-46.275,-4.1) 175(-46.525,4.1) 176(-46.775,-4.1) 177(-47.025,4.1) 178(-47.275,-4.1) 179(-47.525,4.1) 180(-47.775,-4.1) 181(-48.025,4.1) 182(-48.275,-4.1) 183(-48.525,4.1) 184(-48.775,-4.1) 185(-49.025,4.1) 186(-49.275,-4.1) 187(-49.525,4.1) 188(-49.775,-4.1) 189(-50.025,4.1) 190(-50.275,-4.1) 191(-50.525,4.1) 192(-50.775,-4.1) 193(-51.025,4.1) 194(-51.275,-4.1) 195(-51.525,4.1) 196(-51.775,-4.1) 197(-52.025,4.1) 198(-52.275,-4.1) 199(-52.525,4.1) 200(-52.775,-4.1) 201(-53.025,4.1) 202(-53.275,-4.1) 203(-53.525,4.1) 204(-53.775,-4.1) 205(-54.025,4.1) 206(-54.275,-4.1) 207(-54.525,4.1) 208(-54.775,-4.1) 209(-55.025,4.1) 210(-55.275,-4.1) 211(-55.525,4.1) 212(-55.775,-4.1) 213(-56.025,4.1) 214(-56.275,-4.1) 215(-56.525,4.1) 216(-56.775,-4.1) 217(-57.025,4.1) 218(-57.275,-4.1) 219(-57.525,4.1) 220(-57.775,-4.1) 221(-58.025,4.1) 222(-58.275,-4.1) 223(-58.525,4.1) 224(-58.775,-4.1) 225(-59.025,4.1) 226(-59.275,-4.1) 227(-59.525,4.1) 228(-59.775,-4.1) 229(-60.025,4.1) 230(-60.275,-4.1) 231(-60.525,4.1) 232(-60.775,-4.1) 233(-61.025,4.1) 234(-61.275,-4.1) 235(-61.525,4.1) 236(-61.775,-4.1) 237(-62.025,4.1) 238(-62.275,-4.1) 239(-62.525,4.1) 240(-62.775,-4.1) 241(-63.025,4.1) 242(-63.275,-4.1) 243(-63.525,4.1) 244(-63.775,-4.1) 245(-64.025,4.1) 246(-64.275,-4.1) 247(-64.525,4.1) 248(-64.775,-4.1) 249(-65.025,4.1) 250(-65.275,-4.1) 251(-65.525,4.1) 252(-65.775,-4.1) 253(-66.025,4.1) 254(-66.275,-4.1) 255(-66.525,4.1) 256(-66.775,-4.1) 257(-67.025,4.1) 258(-67.275,-4.1) 259(-67.525,4.1) 260(-67.775,-4.1)
  round 1.6 hole 1.6 unplated: H1(0,0)
  round 1.1 hole 1.1 unplated: H2(-68.8,0)
  rect 2x3.5 smd: H3(-72.15,-8) H4(3.35,-12)
  silkscreen extent -73.13,-44.8 4.37,5.18
DIP40PIN-2.54MM_FX [mil]
  rrect100% 60x60 / inner rrect100% 45.28x45.28 / far side rrect100% 60x60 hole 35: 1(-950,-50) 2(-950,50) 3(-850,-50) 4(-850,50) 5(-750,-50) 6(-750,50) 7(-650,-50) 8(-650,50) 9(-550,-50) 10(-550,50) 11(-450,-50) 12(-450,50) 13(-350,-50) 14(-350,50) 15(-250,-50) 16(-250,50) 17(-150,-50) 18(-150,50) 19(-50,-50) 20(-50,50) 21(50,-50) 22(50,50) 23(150,-50) 24(150,50) 25(250,-50) 26(250,50) 27(350,-50) 28(350,50) 29(450,-50) 30(450,50) 31(550,-50) 32(550,50) 33(650,-50) 34(650,50) 35(750,-50) 36(750,50) 37(850,-50) 38(850,50) 39(950,-50) 40(950,50)
  silkscreen extent -1000,-100 1000,100
DO214AA [mm]
  rect 1.8x2 smd: 1(3.6,0) 2(-0.2,0)
  silkscreen extent -1.73,-1.8 3.66,1.8
DP5305 [mm]
  round 1.5 / inner round 1.524 / far side round 1.524 hole 1: 1(-7.62,0) 2(-5.08,0) 3(-2.54,0) 4(0,0) 5(35.56,0) 6(38.1,0) 7(40.64,0) 8(43.18,0)
  silkscreen extent -12.47,-9.6 44.78,2.55
E0402N [mm]
  rect 0.4x0.55 smd: 1(-0.45,0) 2(0.45,0)
  Top region: 0.318,0.178 0.152,0.013 0.324,-0.159 0.324,0.165 0.318,0.165 0.318,0.178
  Top region: 0.368,0.279 0.095,0.006 0.375,-0.273 0.375,0.267 0.368,0.267 0.368,0.279
  Top region: -0.305,-0.165 -0.14,0 -0.311,0.171 -0.311,-0.152 -0.305,-0.152 -0.305,-0.165
  Top region: -0.356,-0.267 -0.083,0.006 -0.362,0.286 -0.362,-0.254 -0.356,-0.254 -0.356,-0.267
  Top lines w0.051: 0.508,0.191 0.317,0.191 ; 0.508,-0.178 0.318,-0.178 ; 0.47,0.152 0.279,0.152 ; 0.47,-0.14 0.279,-0.14 ; 0.445,-0.102 0.254,-0.102 ; 0.432,0.114 0.241,0.114 ; 0.419,-0.076 0.229,-0.076 ; 0.406,0.076 0.216,0.076 ; 0.394,-0.051 0.203,-0.051 ; 0.368,0.051 0.178,0.051 ; 0.356,-0.025 0.165,-0.025 ; 0.343,0.025 0.152,0.025 ; 0.33,0 0.14,0 ; -0.127,0.013 -0.318,0.013 ; -0.14,-0.013 -0.33,-0.013 ; -0.152,0.038 -0.343,0.038 ; -0.165,-0.038 -0.356,-0.038 ; -0.191,0.063 -0.381,0.063 ; -0.203,-0.064 -0.394,-0.064 ; -0.216,0.089 -0.406,0.089 ; -0.229,-0.102 -0.419,-0.102 ; -0.241,0.114 -0.432,0.114 ; -0.267,0.152 -0.457,0.152 ; -0.267,-0.14 -0.457,-0.14 ; -0.305,0.19 -0.495,0.19 ; -0.305,-0.178 -0.495,-0.178
  silkscreen extent -0.8,-0.4 0.8,0.4
ESD0402 [mm]
  rect 0.5x0.5 smd: 1(-0.499,0) 2(0.479,0)
  Top region: 0.241,0.178 0.064,0 0.241,-0.178 0.241,0.178
  Top region: -0.267,0.203 -0.064,0 -0.267,-0.203 -0.267,0.203
  Top keep-out region: -0.25,0.25 -0.25,-0.25 0.25,-0.25 0.25,0.25 -0.25,0.25
  silkscreen extent -0.9,-0.4 0.89,0.4
FPC15PIN-1.0MM-LS [mm]
  rect 0.6x1.775 smd: 1(0,0) 2(1,0) 3(2,0) 4(3,0) 5(4,0) 6(5,0) 7(6,0) 8(7,0) 9(8,0) 10(9,0) 11(10,0) 12(11,0) 13(12,0) 14(13,0) 15(14,0) 16(0,-3.125) 17(1,-3.125) 18(2,-3.125) 19(3,-3.125) 20(4,-3.125) 21(5,-3.125) 22(6,-3.125) 23(7,-3.125) 24(8,-3.125) 25(9,-3.125) 26(10,-3.125) 27(11,-3.125) 28(12,-3.125) 29(13,-3.125) 30(14,-3.125)
  silkscreen extent -4.3,-3.2 18.2,0
GL3523_OTY30 [mm]
  oval 0.2x0.9 smd: 1(-3.6,-4.45) 2(-3.2,-4.45) 3(-2.8,-4.45) 4(-2.4,-4.45) 5(-2,-4.45) 6(-1.6,-4.45) 7(-1.2,-4.45) 8(-0.8,-4.45) 9(-0.4,-4.45) 10(0,-4.45) 11(0.4,-4.45) 12(0.8,-4.45) 13(1.2,-4.45) 14(1.6,-4.45) 15(2,-4.45) 16(2.4,-4.45) 17(2.8,-4.45) 18(3.2,-4.45) 19(3.6,-4.45) 39(3.6,4.45) 40(3.2,4.45) 41(2.8,4.45) 42(2.4,4.45) 43(2,4.45) 44(1.6,4.45) 45(1.2,4.45) 46(0.8,4.45) 47(0.4,4.45) 48(0,4.45) 49(-0.4,4.45) 50(-0.8,4.45) 51(-1.2,4.45) 52(-1.6,4.45) 53(-2,4.45) 54(-2.4,4.45) 55(-2.8,4.45) 56(-3.2,4.45) 57(-3.6,4.45)
  oval 0.9x0.2 smd: 20(4.45,-3.6) 21(4.45,-3.2) 22(4.45,-2.8) 23(4.45,-2.4) 24(4.45,-2) 25(4.45,-1.6) 26(4.45,-1.2) 27(4.45,-0.8) 28(4.45,-0.4) 29(4.45,0) 30(4.45,0.4) 31(4.45,0.8) 32(4.45,1.2) 33(4.45,1.6) 34(4.45,2) 35(4.45,2.4) 36(4.45,2.8) 37(4.45,3.2) 38(4.45,3.6) 58(-4.45,3.6) 59(-4.45,3.2) 60(-4.45,2.8) 61(-4.45,2.4) 62(-4.45,2) 63(-4.45,1.6) 64(-4.45,1.2) 65(-4.45,0.8) 66(-4.45,0.4) 67(-4.45,0) 68(-4.45,-0.4) 69(-4.45,-0.8) 70(-4.45,-1.2) 71(-4.45,-1.6) 72(-4.45,-2) 73(-4.45,-2.4) 74(-4.45,-2.8) 75(-4.45,-3.2) 76(-4.45,-3.6)
  rect 6.4x6.4 smd: 77(0,0)
  silkscreen extent -5.9,-6 6,6
H3_5X6XH7_5A [mm]
  round 6 hole 2.3: 1(0,0)
HOLE5X2_75 [mm]
  round 2.9 hole 2.75: 1(0,0)
  Top keep-out region: 2.61,0 2.411,0.999 1.846,1.846 0.999,2.411 0,2.61 0,2.61 -0.999,2.411 -1.846,1.846 -2.411,0.999 -2.61,0 -2.61,0 -2.411,-0.999 -1.846,-1.846 -0.999,-2.411 0,-2.61 0,-2.61 0.999,-2.411 1.846,-1.846 2.411,-0.999 2.61,0
  Bottom keep-out region: 2.61,0 2.411,0.999 1.846,1.846 0.999,2.411 0,2.61 0,2.61 -0.999,2.411 -1.846,1.846 -2.411,0.999 -2.61,0 -2.61,0 -2.411,-0.999 -1.846,-1.846 -0.999,-2.411 0,-2.61 0,-2.61 0.999,-2.411 1.846,-1.846 2.411,-0.999 2.61,0
IND_3X3 [mm]
  rect 3x1.1 smd: 1(0,-0.95) 2(0,0.95)
  Top keep-out region: -1.5,0.45 1.5,0.45 1.5,-0.4 -1.5,-0.4 -1.5,0.45
  silkscreen extent -1.73,-1.71 1.72,1.72
IND_606045 [mm]
  rect 2.2x6 smd mask+0.05: 1(-1.9,0) 2(1.9,0)
  silkscreen extent -0.61,-3 0.6,3
L0402 [mm]
  rect 0.5x0.5 smd: 1(-0.4,0) 2(0.4,0)
  silkscreen extent -0.8,-0.4 0.8,0.4
LED0603 [mm]
  rect 0.9x0.9 smd: 1(-0.8,0) 2(0.8,0)
  silkscreen extent -1.78,-0.65 1.4,0.65
M2_NGFF_KEY_E_1 [mm]
  rect 0.3x1.6 smd: 1(-9.25,3.725) 2(-9,-3.725) 3(-8.75,3.725) 4(-8.5,-3.725) 5(-8.25,3.725) 6(-8,-3.725) 7(-7.75,3.725) 8(-7.5,-3.725) 9(-7.25,3.725) 10(-7,-3.725) 11(-6.75,3.725) 12(-6.5,-3.725) 13(-6.25,3.725) 14(-6,-3.725) 15(-5.75,3.725) 16(-5.5,-3.725) 17(-5.25,3.725) 18(-5,-3.725) 19(-4.75,3.725) 20(-4.5,-3.725) 21(-4.25,3.725) 22(-4,-3.725) 23(-3.75,3.725) 32(-1.5,-3.725) 33(-1.25,3.725) 34(-1,-3.725) 35(-0.75,3.725) 36(-0.5,-3.725) 37(-0.25,3.725) 38(0,-3.725) 39(0.25,3.725) 40(0.5,-3.725) 41(0.75,3.725) 42(1,-3.725) 43(1.25,3.725) 44(1.5,-3.725) 45(1.75,3.725) 46(2,-3.725) 47(2.25,3.725) 48(2.5,-3.725) 49(2.75,3.725) 50(3,-3.725) 51(3.25,3.725) 52(3.5,-3.725) 53(3.75,3.725) 54(4,-3.725) 55(4.25,3.725) 56(4.5,-3.725) 57(4.75,3.725) 58(5,-3.725) 59(5.25,3.725) 60(5.5,-3.725) 61(5.75,3.725) 62(6,-3.725) 63(6.25,3.725) 64(6.5,-3.725) 65(6.75,3.725) 66(7,-3.725) 67(7.25,3.75) 68(7.5,-3.725) 69(7.75,3.725) 70(8,-3.725) 71(8.25,3.725) 72(8.5,-3.725) 73(8.75,3.725) 74(9,-3.725) 75(9.25,3.725)
  rect 1.2x2.8 smd: 76(10.35,3.025) 77(-10.35,3.025)
  round 1.2 hole 1.2 unplated: 78(-10,-1.475)
  round 1.7 hole 1.7 unplated: 79(10,-1.475)
  round 3.7 hole 2.7: 80(0.05,-29.05)
  silkscreen extent -10.97,-31.58 10.97,4.84
MBS [mm]
  rect 1.2x1.84 smd: 1(0,6) 2(-2.4,6) 3(-2.4,0) 4(0,0)
  silkscreen extent -3.65,1 1.49,6.44
MICRO_USB_2 [mm]
  rect 0.45x1.3 smd: 1(-1.3,0) 2(-0.65,0) 3(0,0) 4(0.65,0) 5(1.3,0)
  oval 1.5x2.2 hole 0.85 slot 1.4 at 90 deg: 6(-3.725,0) 7(3.725,0)
  oval 1.2x2 hole 0.55 slot 1.2 at 90 deg: 8(-3.875,-3.85) 9(3.875,-3.85)
  rect 0.1x0.1 smd: 10(-1.6,-3) 11(1.6,-3)
  round 0.8 hole 0.8 unplated: 12(-2.5,-1.1) 13(2.5,-1.1)
  silkscreen extent -4.3,-6.25 4.3,1.35
QFN12_2R00X3R00X1R00 [mm]
  rect 1.5x0.25 smd mask+0.025: 1(-0.55,0.5) 2(-0.55,-0.5) 7(0.55,0)
  rect 0.25x0.7 smd mask+0.025: 3(-0.75,-1.45) 4(-0.25,-1.45) 5(0.25,-1.45) 6(0.75,-1.45) 9(0.75,1.45) 10(0.25,1.45) 11(-0.25,1.45) 12(-0.75,1.45)
  rect 0.7x0.25 smd mask+0.025: 8(0.95,0.5)
  silkscreen extent -1.81,0.33 -1.5,0.64
R0201 [mm]
  rect 0.3x0.3 smd: 1(-0.25,0) 2(0.25,0)
  silkscreen extent -0.5,-0.25 0.5,0.25
R0402 [mm]
  rect 0.5x0.5 smd: 1(-0.4,0) 2(0.4,0)
  silkscreen extent -0.8,-0.4 0.8,0.4
R0603 [mm]
  rect 0.7x0.9 smd: 1(-0.7,0) 2(0.7,0)
  silkscreen extent -1.2,-0.6 1.2,0.6
R1206 [mm]
  rect 1.4x1.6 smd mask+0.05: 1(-1.3,0) 2(1.3,0)
  silkscreen extent -2.2,-1 2.2,1
RJ45_HRK1 [mm]
  rect 1.524x1.524 hole 0.9 mask+0.05: 1(0,0)
  round 1.524 / inner round 1.1 / far side round 1.524 hole 0.9 mask+0.05: 2(1.27,-2.54) 3(2.54,0) 4(3.81,-2.54) 5(5.08,0) 6(6.35,-2.54) 7(7.62,0) 8(8.89,-2.54) 9(10.16,0) 10(11.43,-2.54) 11(0,-5.06) 12(2.54,-6.33) 13(8.89,-6.33) 14(11.43,-5.06) 18(12.36,-12.95)
  round 1.524 hole 1.02 mask+0.05: 15(-0.92,-12.95) 16(1.62,-12.95) 17(9.82,-12.95)
  rrect100% 2x2 / inner rrect100% 2.2x2.2 / far side rrect100% 2.2x2.2 hole 1.6 mask+0.15: 19(-2.13,-5.84) 20(13.57,-5.84)
  round 3.25 hole 3.25: 21(0.005,-8.89) 22(11.435,-8.89)
  silkscreen extent -2.33,-19.64 13.77,1.71
SMD-2P-1.25 [mm]
  rect 0.6x2.5 smd: 1(0.625,0.25) 2(-0.625,0.25)
  rect 2x2.7 smd: 3(-3.1,-3) 4(3.1,-3)
SOD_123 [mm]
  rect 1x1 smd mask+0.05: 1(-1.8,0) 2(1.8,0)
  silkscreen extent -1.11,-0.9 2.93,0.9
SOD_123A [mm]
  rect 1x1 smd mask+0.05: 1(-1.8,0) 2(1.8,0)
  silkscreen extent -1.11,-0.9 2.88,0.9
SOD_323 [mm]
  rect 0.8x0.6 smd mask+0.05: 1(-1.2,0) 2(1.2,0)
  silkscreen extent -0.67,-0.65 2.18,0.65
SOD_323A [mm]
  rect 0.8x0.6 smd mask+0.05: 1(-1.2,0) 2(1.2,0)
  silkscreen extent -0.67,-0.65 1.38,0.93
SON10_2R50X1R00X0R50 [mm]
  rect 0.2x0.675 smd mask+0.05: 1(-1,-0.437) 2(-0.5,-0.437) 4(0.5,-0.437) 5(1,-0.437) 6(1,0.437) 7(0.5,0.437) 9(-0.5,0.437) 10(-1,0.437)
  rect 0.4x0.775 smd mask+0.05: 3(0,-0.387) 8(0,0.388)
  silkscreen extent -1.25,-0.5 1.25,0.5
SOT23 [mil]
  rect 39x39 smd: 1(-38,-46.5) 2(38,-46.5)
  rect 39x47.24 smd: 3(0,42.56)
  silkscreen extent -59,-21 59,21
SOT563 [mm]
  rect 0.375x0.5 smd: 1(0,0) 2(0.5,0) 3(1,0) 4(1,1.7) 5(0.5,1.7) 6(0,1.7)
  silkscreen extent -0.78,-0.18 1.3,1.3
SOT723 [mm]
  rect 0.4x0.3 smd: 1(0,0) 2(0.805,0) 3(0.403,0.94)
  silkscreen extent -0.22,-0.17 1.02,1.12
SOT_23_5 [mm]
  oval 1.1x0.6 smd mask+0.064: 1(0,0)
  rect 1.1x0.6 smd mask+0.064: 2(0,-1) 3(0,-2) 4(2.8,-2) 5(2.8,0)
  silkscreen extent -0.28,-2.5 1.95,0.98
SOT_23_5A [mm]
  oval 1.1x0.6 smd mask+0.064: 1(0,0)
  rect 1.1x0.6 smd mask+0.064: 2(0,-1) 3(0,-2) 4(2.8,-2) 5(2.8,0)
  silkscreen extent 0.22,-2.5 1.95,1.03
SOT_23_5B [mm]
  oval 1.1x0.6 smd mask+0.064: 1(0,0)
  rect 1.1x0.6 smd mask+0.064: 2(0,-1) 3(0,-2) 4(2.8,-2) 5(2.8,0)
  silkscreen extent -0.83,-2.5 1.95,0.83
SOT_323 [mm]
  rect 0.7x0.9 smd mask+0.05: 1(-0.65,-0.95) 2(0.65,-0.95) 3(0,0.95)
  silkscreen extent -1.1,-0.67 1.1,0.67
TCM0605T [mm]
  rect 0.3x0.23 smd: 1(-0.25,0.25) 2(-0.25,-0.23) 3(0.25,-0.23) 4(0.25,0.25)
  silkscreen extent -0.9,-0.4 0.45,0.45
TF008 [mm]
  rect 0.75x1.35 smd: 1(3.187,-3.792) 2(2.087,-3.792) 3(0.988,-3.792) 4(-0.112,-3.792) 5(-1.212,-3.792) 6(-2.312,-3.792) 7(-3.413,-3.792) 8(-4.513,-3.792)
  rect 0.65x1.35 smd: 9(4.187,-3.792)
  rect 0.775x1.2 smd: 10(5.587,-0.212) 15(-5.713,0.487)
  rect 1.075x1.075 smd: 11(5.425,4.7) 14(-5.45,4.7)
  rect 1.4x1.075 smd: 12(2.987,4.7) 13(-3.812,4.7)
  rect 1.7x1.5 smd: 16(-5.112,-5.562) 17(5.088,-5.562)
  rect 0.8x0.9 smd: D2(5.4,2.2)
  silkscreen extent -6.16,-6.4 6.04,5.4
TP [mm]
  round 1 smd: 1(0,0)
  silkscreen extent -0.6,-0.6 0.6,0.6
TS018B- [mm]
  rect 0.75x1.2 smd: 1(-1.175,2.8) 2(0,2.8) 3(1.175,2.8)
  oval 0.8x1.2 hole 0.5 slot 0.9 at 90 deg: 4(-2.15,1.5) 5(2.15,1.5)
  rect 1.3x0.5 smd: 6(-1.85,0.25) 7(1.85,0.25)
  Top keep-out region: -1,1.2 -1,0 1,0 1,1.2 -1,1.2
  silkscreen extent -2.3,-0.4 2.3,3.3
USB30_DUAL [mm]
  round 1.2 / inner round 0.9 / far side round 1.2 hole 0.7: 1(-10.07,-0.48) 2(-7.57,-0.48) 3(-5.57,-0.48) 4(-3.07,-0.48) 5(-2.57,1.02) 6(-4.57,1.02) 7(-6.57,1.02) 8(-8.57,1.02) 9(-10.57,1.02) 12(-10.07,-3.68) 13(-7.57,-3.68) 14(-5.57,-3.68) 15(-3.07,-3.68) 16(-2.57,-2.18) 17(-4.57,-2.18) 18(-6.57,-2.18) 19(-8.57,-2.18) 20(-10.57,-2.18)
  rect 2.7x3.6 / inner round 2.5 / far side rect 2.7x3.6 hole 2.3: 10(-13.14,0) 11(0,0) 21(0,-5.68) 22(-13.14,-5.68)
USON8 [mm]
  rect 0.7x0.25 smd: 1(0,0.5) 2(0,0) 3(0,-0.5) 4(0,-1) 5(3,-1) 6(3,-0.5) 7(3,0) 8(3,0.5)
  rect 0.25x1.6 smd: 9(1.5,-0.25)
  silkscreen extent -0.48,-1.25 3.5,1.23
WCM2012F [mm]
  rect 0.75x0.4 smd: 1(0,0) 2(1.85,0) 3(0,-0.85) 4(1.85,-0.85)
  silkscreen extent 0.4,-0.8 1.4,0

## Via types
v1: diameter 15.75, hole 7.87, Top to Bottom, 1425 vias
v2: diameter 19.68, hole 11.81, Top to Bottom, 169 vias

## Nets (pads, with @x,y where several pads share a name; then routed paths per layer and width w, separated by ;. In a path a pad name is that pad's centre, name@x,y a point inside that pad or via, vN(x,y) a via of type N, cw(c..) or ccw(c..) an arc to the next point about the centre after c; other vN are vias at no path point)
1A1-PCIE20X1_1WAKE: U1.228 U8.B3 | length 1287.9
  Top w3.94: U8.B3@381.89,566.93 446.17,566.93 468.5,589.26 468.5,1185.04 545.28,1261.81 545.28,1293.31 v1(559.06,1307.09) ; v1(755.91,1391.73) 806.1,1391.73 851.38,1437.01 U1.228@851.38,1527.56
  Bottom w3.94: v1(559.06,1307.09) 561.02,1309.06 663.83,1309.06 746.51,1391.73 v1(755.91,1391.73)
32KOUT_WIFI: U1.210 U14.A3 | length 149.5
  Top w3.94: U14.A3@952.76,1409.45 952.76,1421.26 1028.54,1497.05 U1.210@1028.54,1527.56
32KOUT_WIFI/: U13.50 U14.A1 | length 561.5
  Top w3.94: v1(854.33,1269.69) 854.33,1096.65 968.7,982.28 986.61,982.28 U13.50@1026.58,982.28 ; v1(952.76,1354.33) U14.A1@952.76,1370.08
  Bottom w3.94: v1(854.33,1269.69) 891.73,1307.09 891.73,1340.55 905.51,1354.33 v1(952.76,1354.33)
+V3P3SX: C90482.1 C90483.1 J6.D20 R95120.1 U90094.1 | length 415.5
  Top w7.87: R95120.1@3015.75,2208.66 3023.62,2216.54 U90094.1@3066.93,2216.54
  Top w19.68: J6.D20@3049.21,2503.94 3068.9,2484.25 3068.9,2362.2 3055.12,2348.43 C90482.1@3055.12,2291.34 3082.68,2291.34 C90483.1@3098.43,2275.59 3098.43,2226.38 3088.58,2216.54 U90094.1@3066.93,2216.54
BBAT: D1.2 U1.235 | length 3886.9
  Top w11.81: U1.235@782.48,1850.39 782.48,1936.02 v1(783.46,1937.01)
  Top w15.75: v1(1761.81,2139.76) 1761.81,2025.59 1779.53,2007.87 2251.97,2007.87 v1(2299.21,1960.63) ; v1(3383.86,1354.33) 3383.86,1352.36 D1.2@3429.13,1307.09
  Bottom w15.75: v1(783.46,1937.01) 783.46,2053.15 870.08,2139.76 v1(1761.81,2139.76) ; v1(2299.21,1960.63) 2299.21,1687.01 2240.16,1627.95 2240.16,1281.5 2257.87,1263.78 2685.04,1263.78 2730.32,1309.06 2730.32,1348.43 2748.03,1366.14 3372.05,1366.14 v1(3383.86,1354.33)
BQ_OTG_EN_H: Q19.1 U1.128 | length 930.2
  Top w3.94: Q19.1@1332.68,1013.78 1342.52,1013.78 v1(1342.52,1037.4) ; v1(1537.4,1025.59) 1537.4,1160.07 1543.31,1165.97 1543.31,1166.59 1788.14,1411.42 1847.75,1411.42 1914.37,1478.04 U1.128@1914.37,1527.56
  Bottom w3.94: v1(1342.52,1037.4) 1340.55,1037.4 1352.36,1025.59 v1(1537.4,1025.59)
BT_REG_ON_H: CON1.3 U1.143 | length 1893.4
  Top w3.94: v1(1746.06,1840.55) 1766.73,1840.55 U1.143@1766.73,1850.39
  Bottom w3.94: CON1.3@140.94,2040.94 189.76,1992.13 301.18,1992.13 348.43,2039.37 630.67,2039.37 746.81,1923.23 899.18,1923.23 1033.04,2057.09 1268.81,2057.09 1316.93,2008.97 1316.93,1966.73 1443.11,1840.55 v1(1746.06,1840.55)